# EAGLE board darwin-integrated-panel (EAGLE 9.4.2)
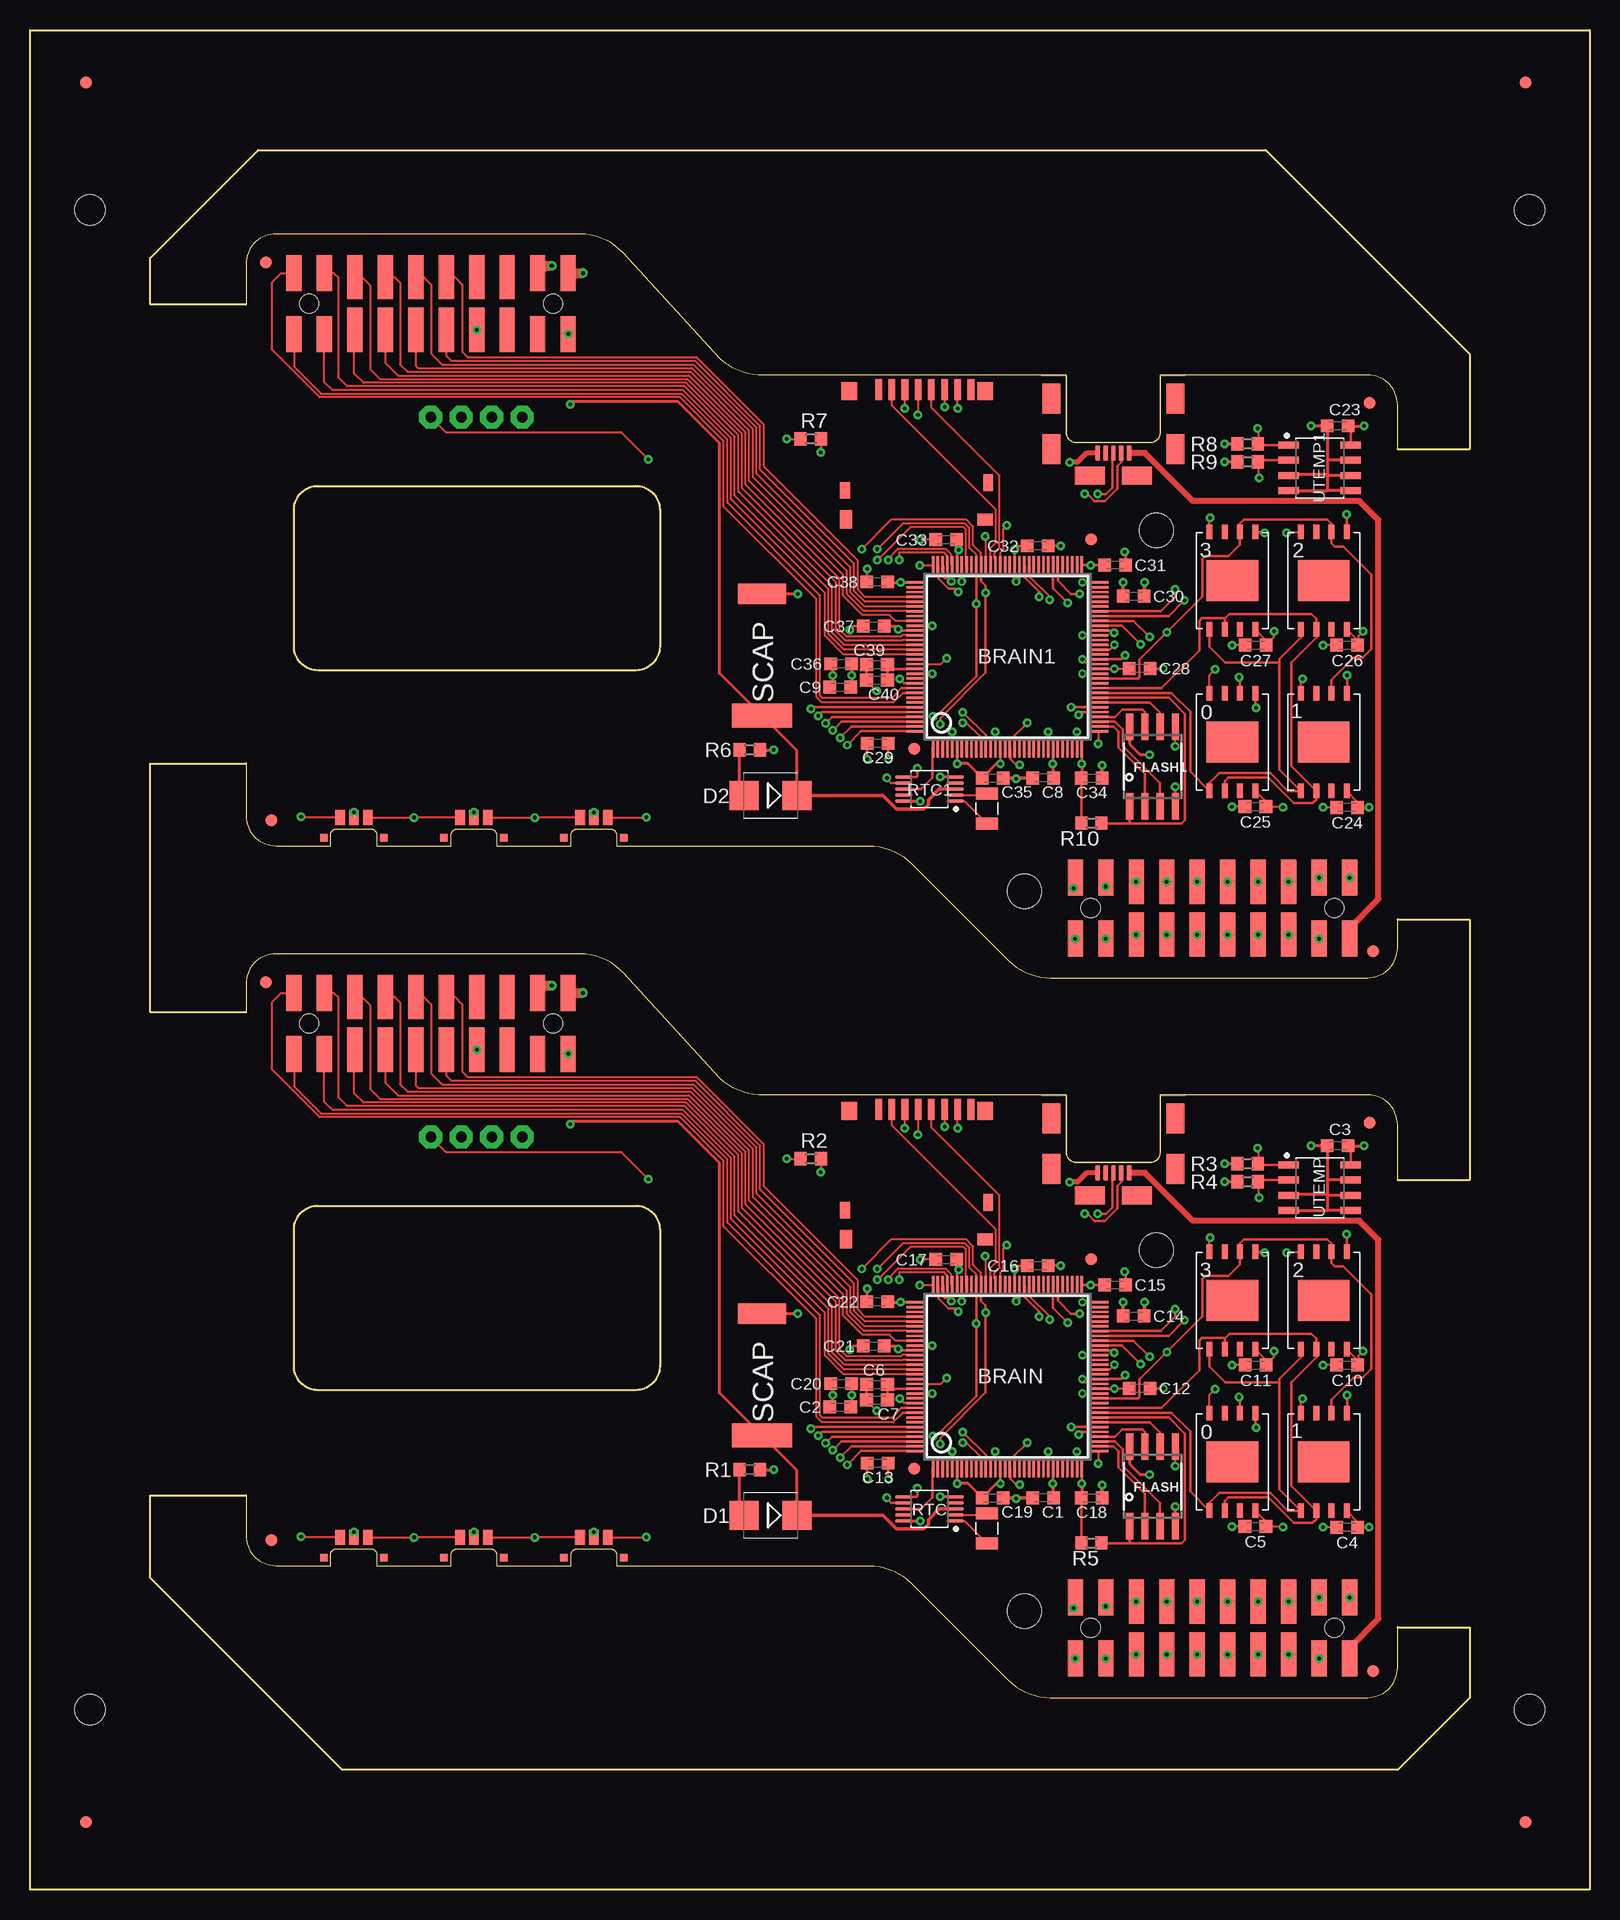
[diagram p0: board, top side]
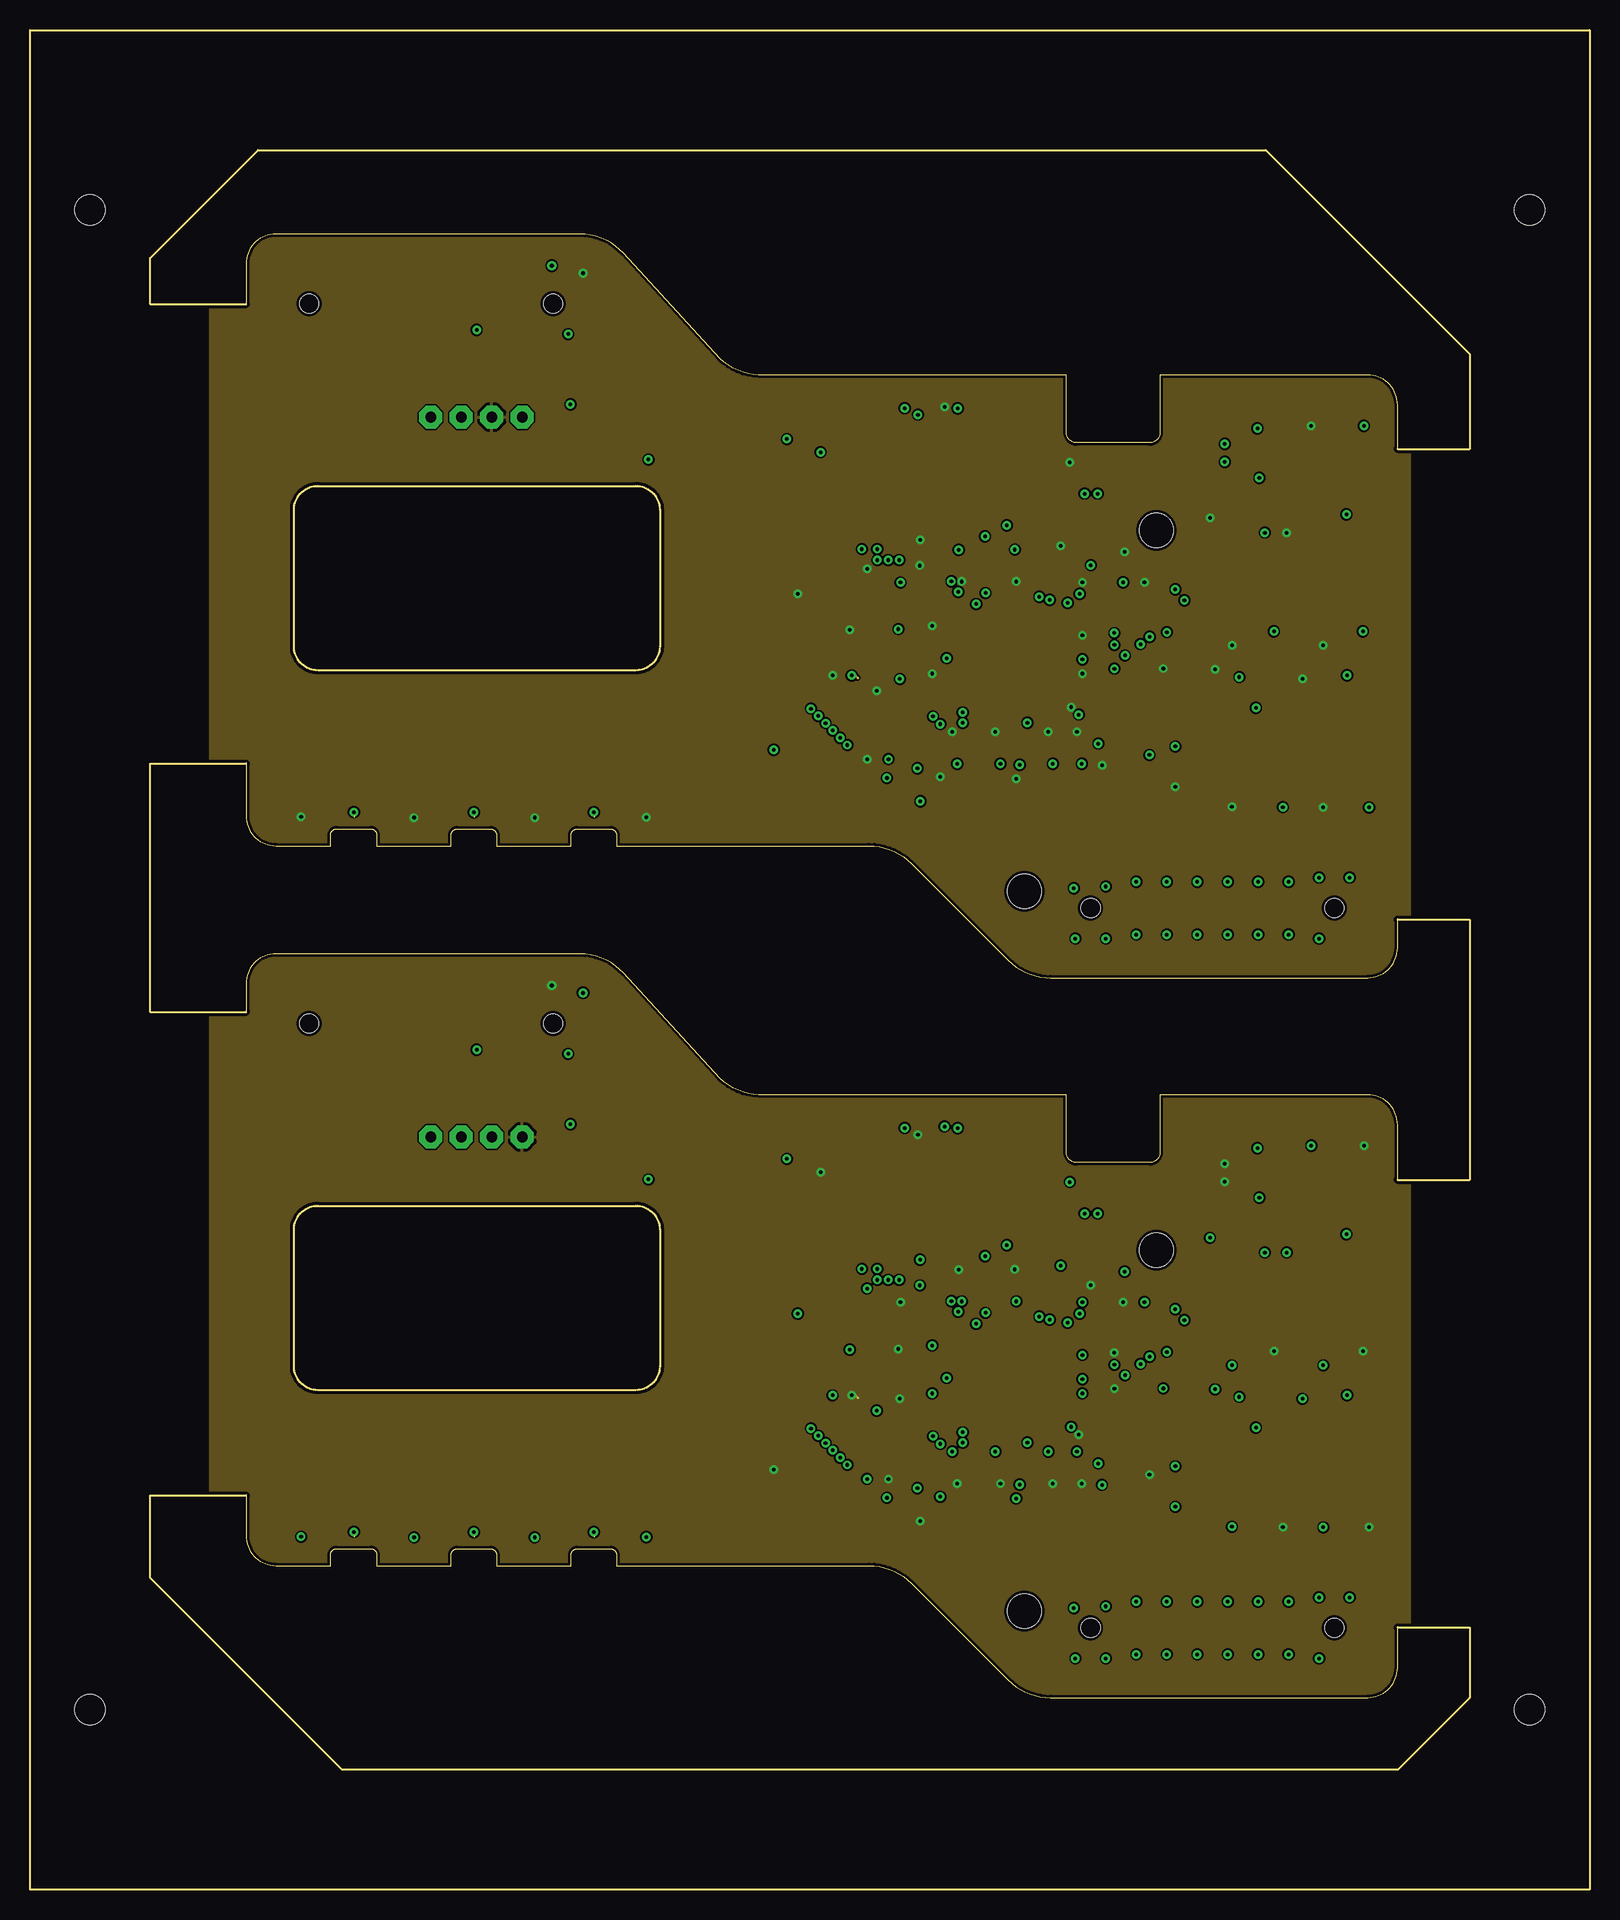
[diagram p1: board, inner layer PWR]
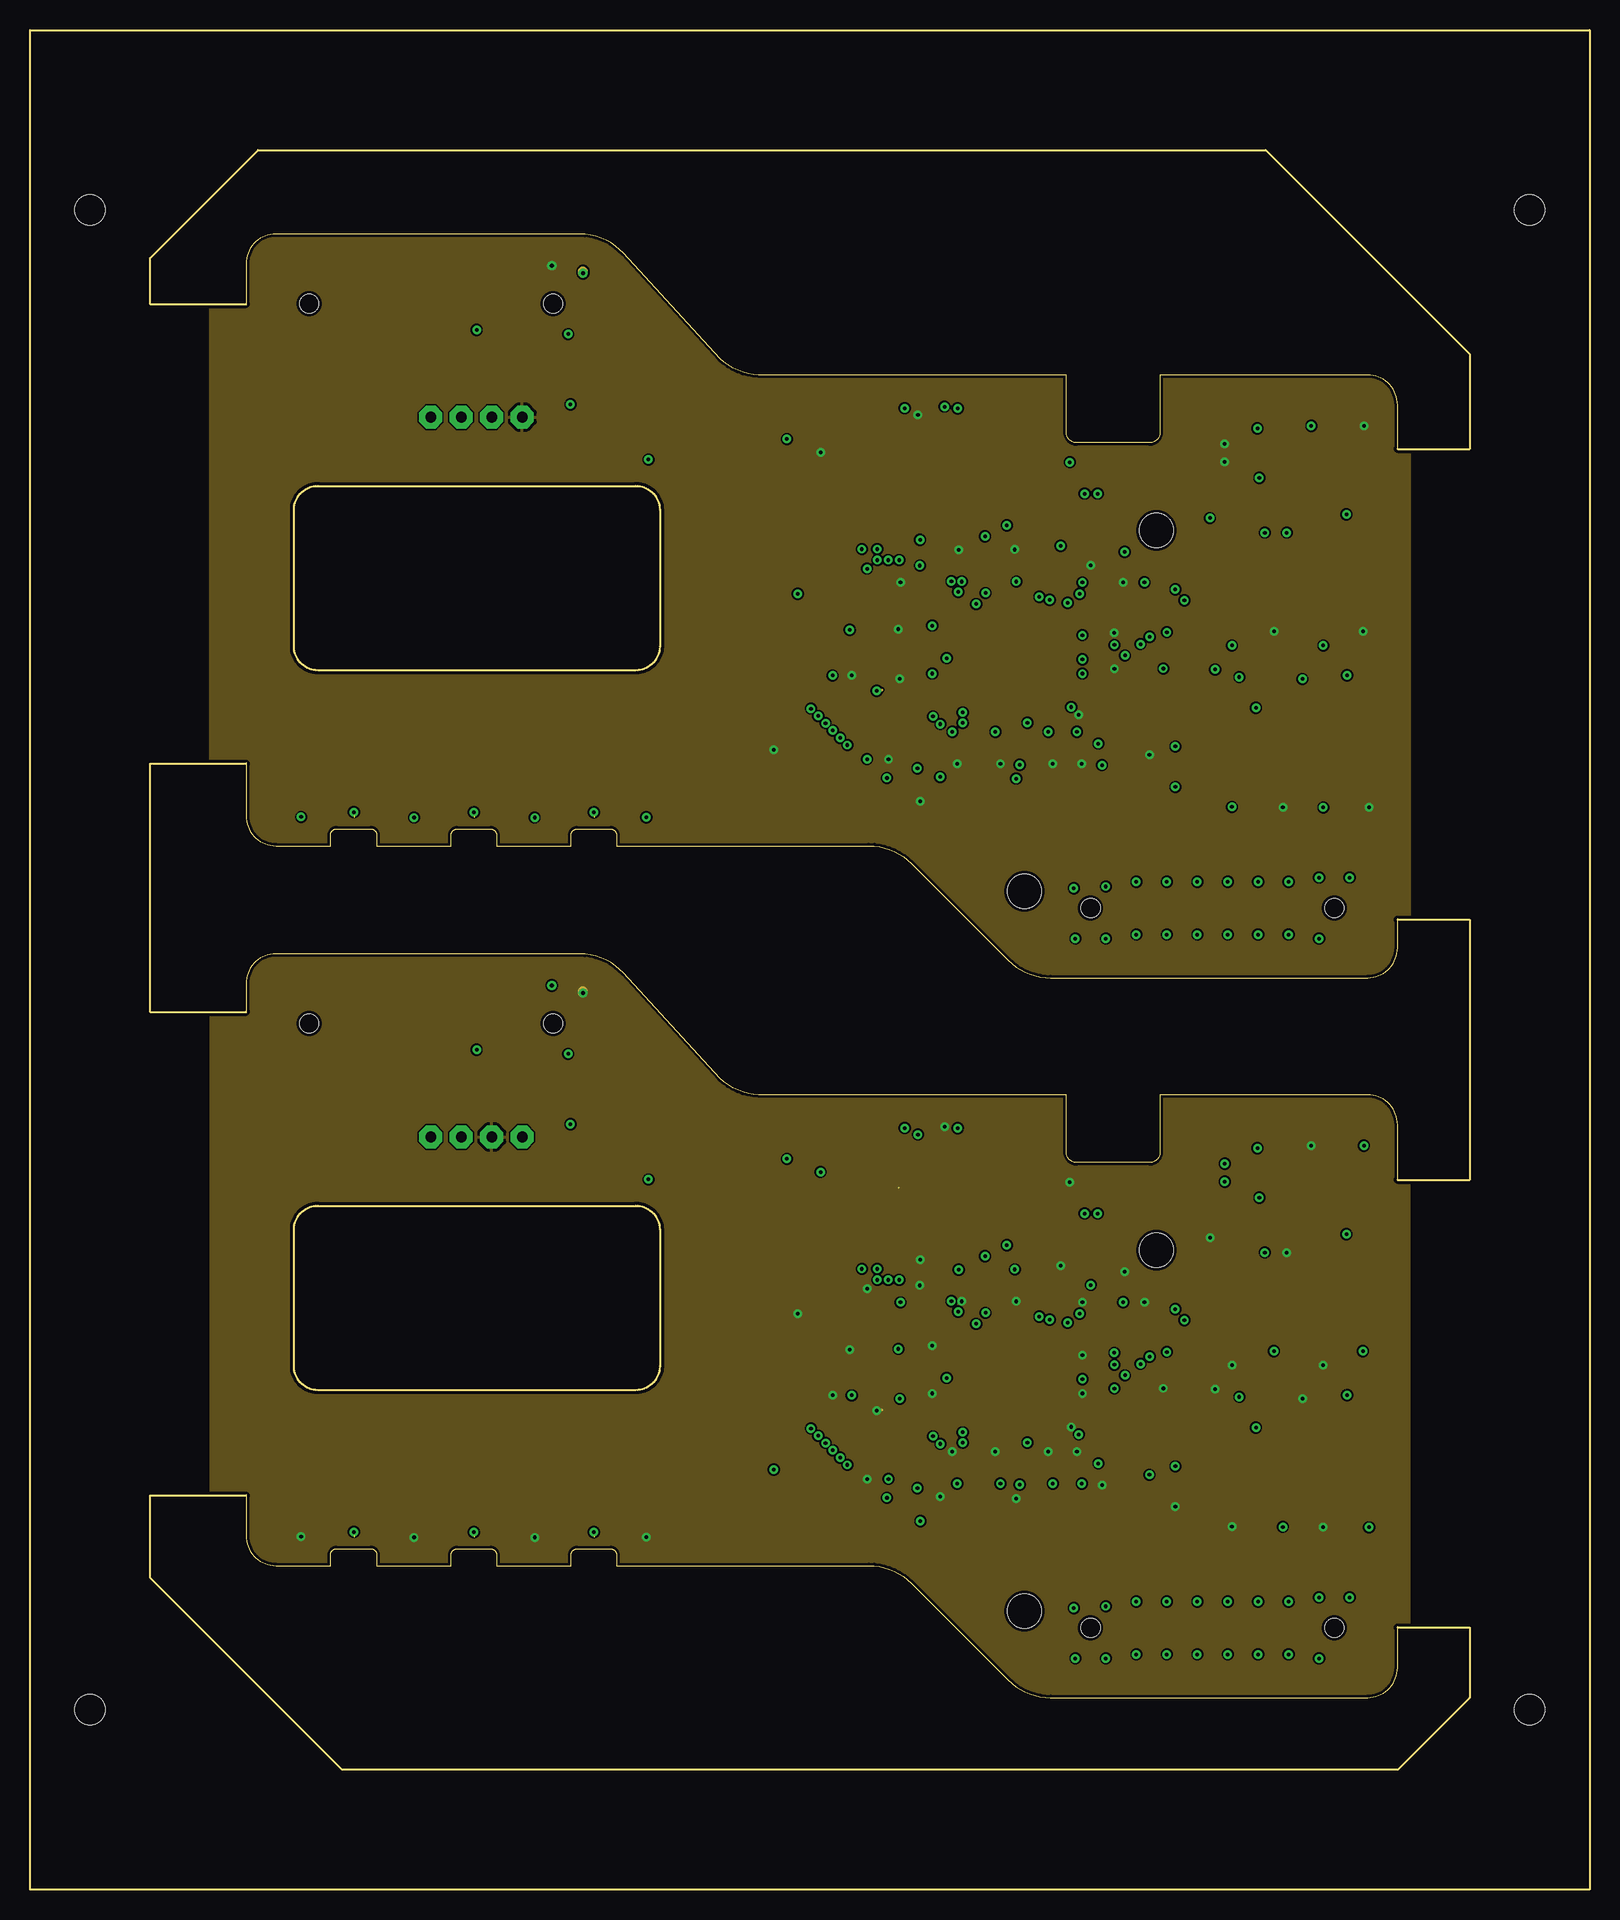
[diagram p2: board, inner layer GND]
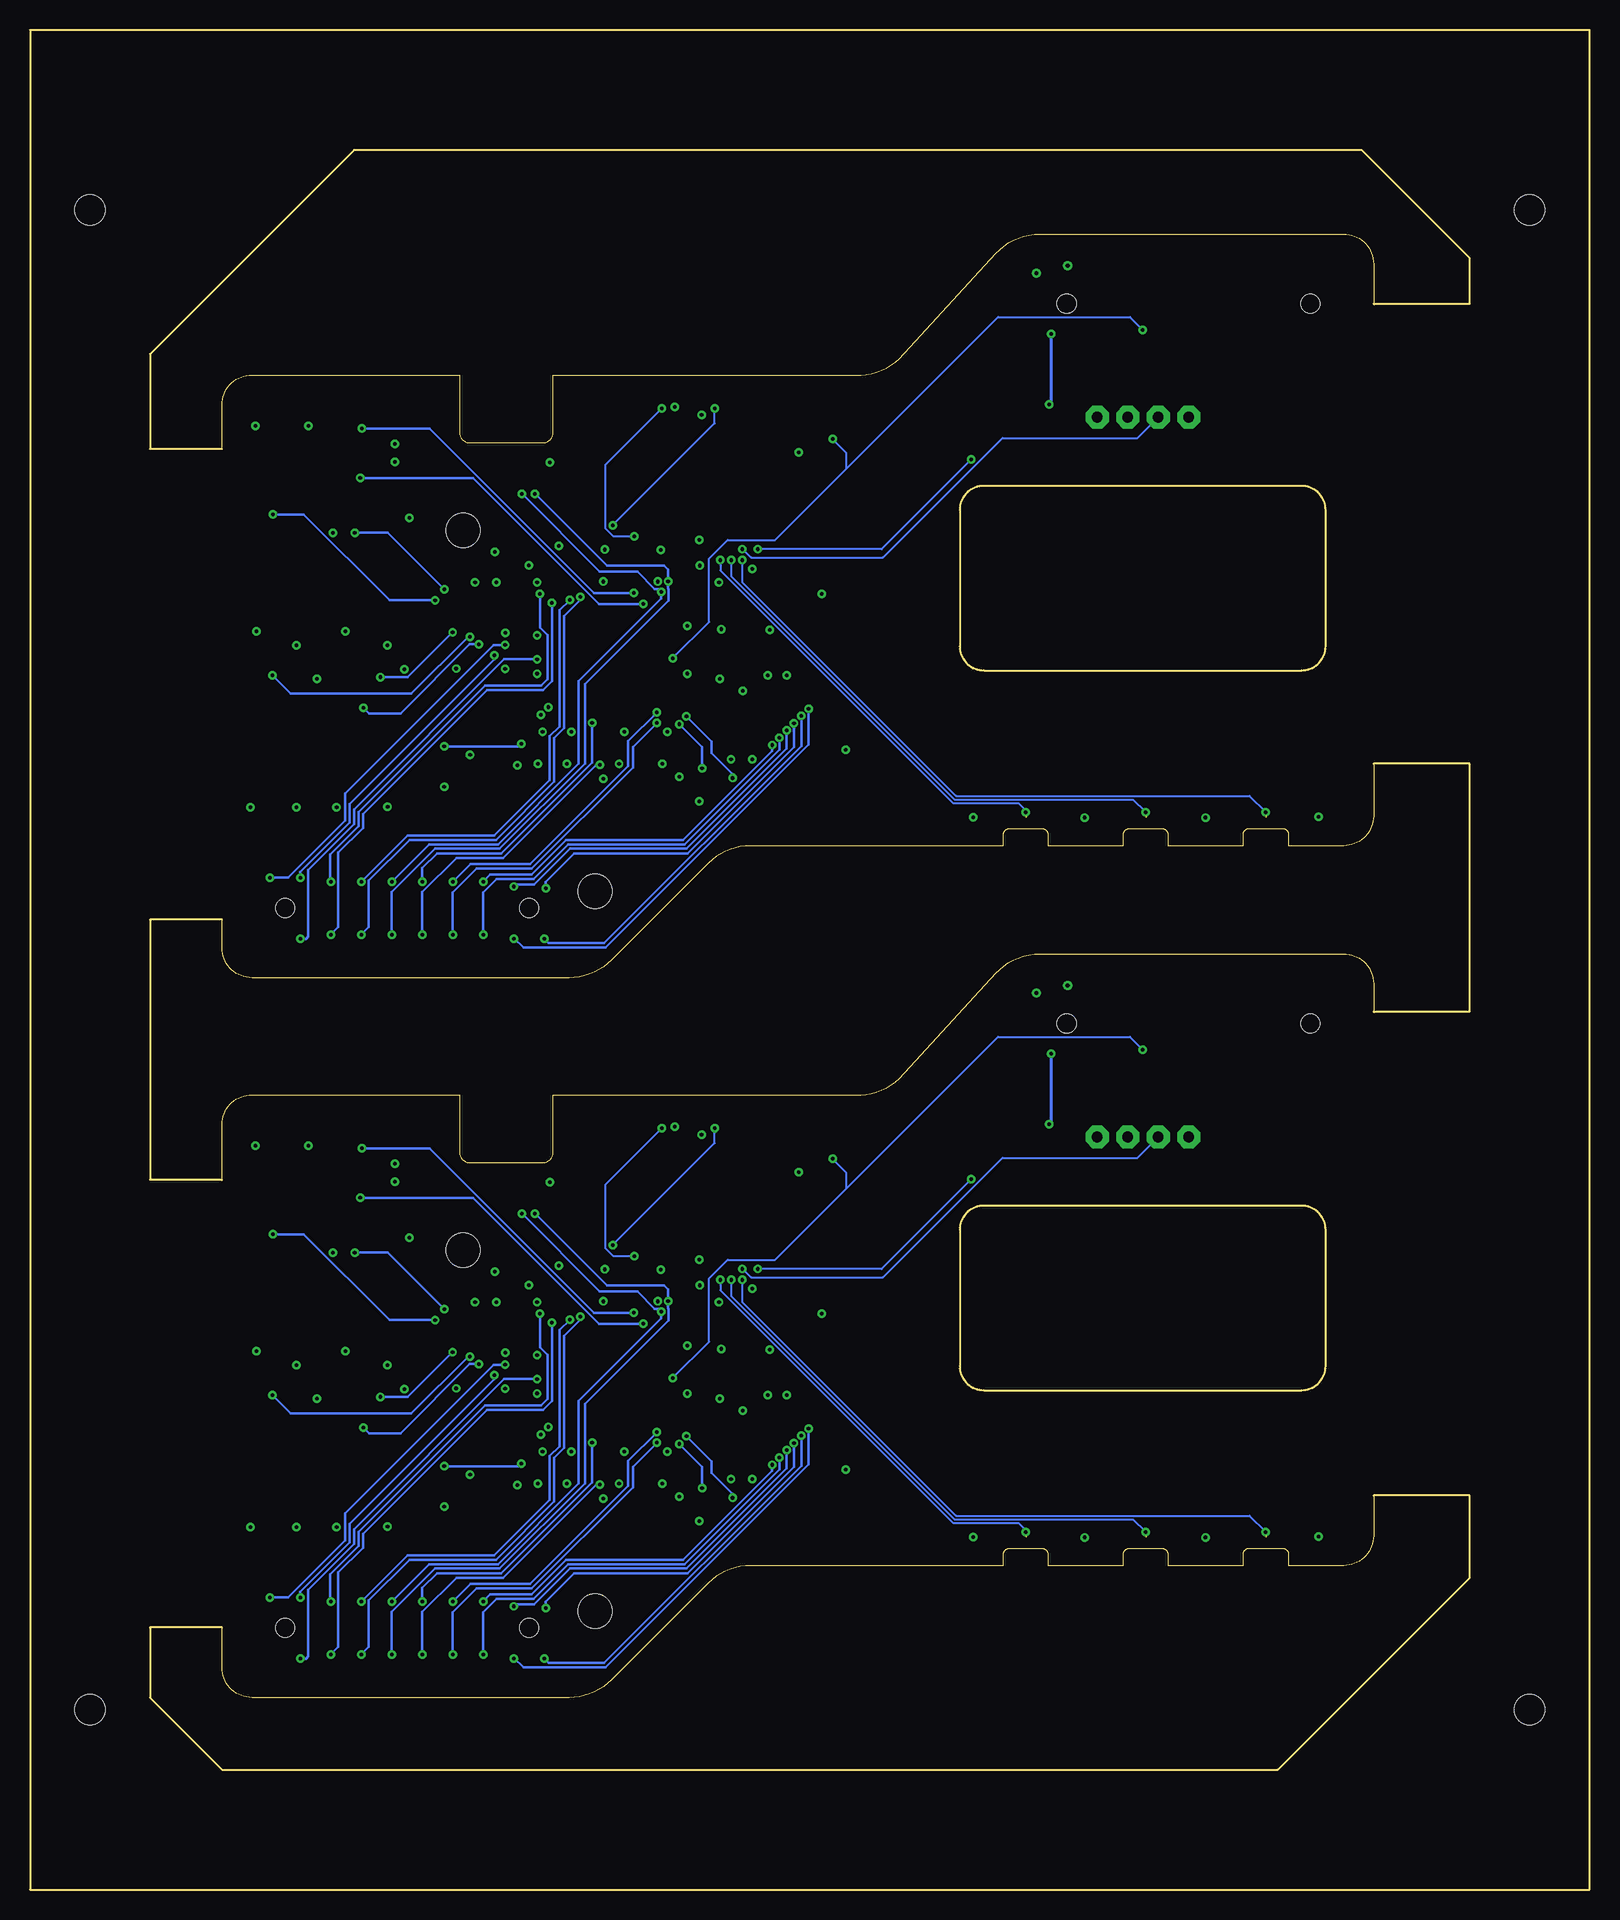
[diagram p3: board, bottom side, seen from below]

Size 130 x 155 mm. Coordinates in mm from the lower left corner, seen from the top.
Outline: 18,93.92 18,93.85
Outline: 18,93.85 18,89.5 arc90 20.5,87 25.06,87 25.06,87.91 arc-90 25.56,88.41 28.4,88.41 arc-90 28.9,87.91 28.9,87 35.1,87 35.1,87.9 arc-90 35.6,88.4 38.4,88.4 arc-90 38.9,87.9 38.9,87 45.1,87 45.1,87.9 arc-90 45.6,88.4 48.4,88.4 arc-90 48.9,87.9 48.9,87 69.93,87 arc-45 73.46,85.54 81.54,77.46 arc45 85.07,76 111.5,76 arc90 114,78.5 114,80.85
Outline: 18,132.15 18,135.5 arc-90 20.5,138 45.8,138 arc-47 49.49,136.38 57.51,127.62 arc47 61.2,126.25 86.4,126.25 86.4,121.44 arc90 87.25,120.59 93.34,120.59 arc90 94.19,121.44 94.19,126.23 94.22,126.23 111.5,126.25 arc-90 114,123.75 114,120.08 120,120.08 120,128 103,145 19,145 10,136 10,132.15 18,132.15
Outline: 18,132.15 18,132.08
Outline: 18,93.85 10,93.85 10,73.15 18,73.15
Outline: 18,73.15 18,75.5 arc-90 20.5,78 45.8,78 arc-47 49.49,76.38 57.51,67.62 arc47 61.2,66.25 86.4,66.25 86.4,61.44 arc90 87.25,60.59 93.34,60.59 arc90 94.19,61.44 94.19,66.23 94.22,66.23 111.5,66.25 arc-90 114,63.75 114,59.15
Outline: 18,73.15 18,73.08
Outline: 18,32.92 18,32.85
Outline: 18,32.85 18,29.5 arc90 20.5,27 25.06,27 25.06,27.91 arc-90 25.56,28.41 28.4,28.41 arc-90 28.9,27.91 28.9,27 35.1,27 35.1,27.9 arc-90 35.6,28.4 38.4,28.4 arc-90 38.9,27.9 38.9,27 45.1,27 45.1,27.9 arc-90 45.6,28.4 48.4,28.4 arc-90 48.9,27.9 48.9,27 69.93,27 arc-45 73.46,25.54 81.54,17.46 arc45 85.07,16 111.5,16 arc90 114,18.5 114,21.85
Outline: 18,32.85 10,32.85 10,26 26,10 114,10 120,16 120,21.85 114,21.85
Outline: 114,80.85 114,80.92
Outline: 114,80.85 120,80.85 120,59.15 114,59.15
Outline: 114,59.08 114,59.15
Outline: 114,21.85 114,21.92
Outline: 50.5,57 arc-90 52.5,55 52.5,43.62 arc-90 50.5,41.62 24,41.62 arc-90 22,43.62 22,55 arc-90 24,57 50.5,57
Outline: 50.5,117 arc-90 52.5,115 52.5,103.62 arc-90 50.5,101.62 24,101.62 arc-90 22,103.62 22,115 arc-90 24,117 50.5,117
Outline: 0,0 0,155 130,155 130,0 0,0
Copper layers (1+2*15+16): Top 0.035mm / dielectric 1.5mm / PWR 0.035mm / dielectric 0.15mm / GND 0.035mm / dielectric 0.2mm / Bottom 0.035mm
Design rules "default *": minimum track width 6mil, minimum drill 0.3mm, track to track 6mil, track to pad 6mil, pad to pad 6mil, via to via 6mil, smd to smd 6mil, copper to edge 10mil, drill to drill 6mil, minimum pad ring 10mil, minimum via ring 8mil, stop-mask expansion 4mil, vias tented up to drill 0.31mm, thermal gap 10mil
Holes 2.84 mm at 93.9,53.3 82.9,23.2 93.9,113.3 82.9,83.2
Holes 2.54 mm at 5,140 125,140 5,15 125,15

## Footprints (pad centres in the part's own frame; a part is rotated, then mirrored left to right if it is on the bottom)
SQFP-S-14X14-128 = smd 0.2 x 1.6: 1 -6.2,-7.6; 2 -5.8,-7.6; 3 -5.4,-7.6; 4 -5,-7.6; 5 -4.6,-7.6; 6 -4.2,-7.6; 7 -3.8,-7.6; 8 -3.4,-7.6; 9 -3,-7.6; 10 -2.6,-7.6; 11 -2.2,-7.6; 12 -1.8,-7.6; 13 -1.4,-7.6; 14 -1,-7.6; 15 -0.6,-7.6; 16 -0.2,-7.6; 17 0.2,-7.6; 18 0.6,-7.6; 19 1,-7.6; 20 1.4,-7.6; 21 1.8,-7.6; 22 2.2,-7.6; 23 2.6,-7.6; 24 3,-7.6; 25 3.4,-7.6; 26 3.8,-7.6; 27 4.2,-7.6; 28 4.6,-7.6; 29 5,-7.6; 30 5.4,-7.6; 31 5.8,-7.6; 32 6.2,-7.6; 65 6.2,7.6; 66 5.8,7.6; 67 5.4,7.6; 68 5,7.6; 69 4.6,7.6; 70 4.2,7.6; 71 3.8,7.6; 72 3.4,7.6; 73 3,7.6; 74 2.6,7.6; 75 2.2,7.6; 76 1.8,7.6; 77 1.4,7.6; 78 1,7.6; 79 0.6,7.6; 80 0.2,7.6; 81 -0.2,7.6; 82 -0.6,7.6; 83 -1,7.6; 84 -1.4,7.6; 85 -1.8,7.6; 86 -2.2,7.6; 87 -2.6,7.6; 88 -3,7.6; 89 -3.4,7.6; 90 -3.8,7.6; 91 -4.2,7.6; 92 -4.6,7.6; 93 -5,7.6; 94 -5.4,7.6; 95 -5.8,7.6; 96 -6.2,7.6 | smd 1.6 x 0.2: 33 7.6,-6.2; 34 7.6,-5.8; 35 7.6,-5.4; 36 7.6,-5; 37 7.6,-4.6; 38 7.6,-4.2; 39 7.6,-3.8; 40 7.6,-3.4; 41 7.6,-3; 42 7.6,-2.6; 43 7.6,-2.2; 44 7.6,-1.8; 45 7.6,-1.4; 46 7.6,-1; 47 7.6,-0.6; 48 7.6,-0.2; 49 7.6,0.2; 50 7.6,0.6; 51 7.6,1; 52 7.6,1.4; 53 7.6,1.8; 54 7.6,2.2; 55 7.6,2.6; 56 7.6,3; 57 7.6,3.4; 58 7.6,3.8; 59 7.6,4.2; 60 7.6,4.6; 61 7.6,5; 62 7.6,5.4; 63 7.6,5.8; 64 7.6,6.2; 97 -7.6,6.2; 98 -7.6,5.8; 99 -7.6,5.4; 100 -7.6,5; 101 -7.6,4.6; 102 -7.6,4.2; 103 -7.6,3.8; 104 -7.6,3.4; 105 -7.6,3; 106 -7.6,2.6; 107 -7.6,2.2; 108 -7.6,1.8; 109 -7.6,1.4; 110 -7.6,1; 111 -7.6,0.6; 112 -7.6,0.2; 113 -7.6,-0.2; 114 -7.6,-0.6; 115 -7.6,-1; 116 -7.6,-1.4; 117 -7.6,-1.8; 118 -7.6,-2.2; 119 -7.6,-2.6; 120 -7.6,-3; 121 -7.6,-3.4; 122 -7.6,-3.8; 123 -7.6,-4.2; 124 -7.6,-4.6; 125 -7.6,-5; 126 -7.6,-5.4; 127 -7.6,-5.8; 128 -7.6,-6.2
EVP-AEJB2A = smd 0.8 x 1.25: A0 -1.15,2.375; A1 1.15,2.375; B 0,2.375 | smd 0.65 x 0.65: PAD -2.5,0.675; PAD1 2.5,0.675
C0603K = smd 1.05 x 1.08: 1 -0.875,0; 2 0.875,0
SMB = smd 2.4 x 2.4: A 2.2,0; C -2.2,0
FIDUCIAL_1MM = smd 1 x 1: 1 0,0
SOIC8_208MIL = smd 0.6 x 2.2: 1 -1.905,-3.315; 2 -0.635,-3.315; 3 0.635,-3.315; 4 1.905,-3.315; 5 1.905,3.315; 6 0.635,3.315; 7 -0.635,3.315; 8 -1.905,3.315
20PH-F = smd 3 x 1.27: PIN1 -0.34,0; PIN2 -0.34,-2.54; PIN9 -0.34,-20.32; PIN10 -0.34,-22.86; PIN11 4.74,-22.86; PIN12 4.74,-20.32; PIN19 4.74,-2.54; PIN20 4.74,0 | smd 3.68 x 1.27: PIN3 0,-5.08; PIN4 0,-7.62; PIN5 0,-10.16; PIN6 0,-12.7; PIN7 0,-15.24; PIN8 0,-17.78; PIN13 4.4,-17.78; PIN14 4.4,-15.24; PIN15 4.4,-12.7; PIN16 4.4,-10.16; PIN17 4.4,-7.62; PIN18 4.4,-5.08 | hole 1.58: 2.2,-1.27; 2.2,-21.59
R0603 = smd 1 x 1.1: 1 -0.85,0; 2 0.85,0
SOP50P490X110-10 = smd 1.438 x 0.297: 1 -2.145,1; 2 -2.145,0.5; 3 -2.145,0; 4 -2.145,-0.5; 5 -2.145,-1; 6 2.145,-1; 7 2.145,-0.5; 8 2.145,0; 9 2.145,0.5; 10 2.145,1
WSON8 = smd 0.5 x 1.2: P$1 -1.905,-4.06; P$2 -0.635,-4.06; P$3 0.635,-4.06; P$4 1.905,-4.06; P$5 1.905,4.06; P$6 0.635,4.06; P$7 -0.635,4.06; P$8 -1.905,4.06 | smd 4.3 x 3.4: PAD 0,0
SUPERCAP = smd 5 x 2: + 0,5.15 | smd 4 x 1.7: - 0,-5
MOELX-47491-0001 = smd 1.25 x 0.4: D+ 0.875,0; D- 0.875,0.65; GND 0.875,-1.3; ID 0.875,-0.65; VCC 0.875,1.3 | smd 2.5 x 1.5: PAD1 -3.65,5.15; PAD2 0.55,5.15; PAD5 0.55,-5.15; PAD6 -3.65,-5.15 | smd 1.5 x 2.5: PAD3 2.75,1.95; PAD4 2.75,-1.95
DM3D-SF = smd 0.55 x 1.75: CD/DAT3 6.6,-0.875; CLK 3.3,-0.875; CMD 5.5,-0.875; DAT0 1.1,-0.875; DAT1 0,-0.875; DAT2 7.7,-0.875; VDD 4.4,-0.875; VSS 2.2,-0.875 | smd 1.3 x 1.5: PAD1 -1.2,-0.75; PAD2 10.15,-0.75 | smd 0.8 x 1.4: PAD3 10.5,7.5; PAD6 -1.45,6.85 | smd 1 x 1.55: PAD4 10.4,9.925 | smd 1.3 x 1: PAD5 -1.2,9.925
SCREEN = drill 0.889 pad 1.905 octagon: P0 13.97,1.27; P1 16.51,1.27; P2 19.05,1.27; P3 21.59,1.27
ABS07W = smd 1 x 1.8: P$1 -1.25,0; P$2 1.25,0
SO8 = smd 1.746 x 0.592: 1 -2.585,1.905; 2 -2.585,0.635; 3 -2.585,-0.635; 4 -2.585,-1.905; 5 2.585,-1.905; 6 2.585,-0.635; 7 2.585,0.635; 8 2.585,1.905

## Placement (x,y rotation side)
BRAIN  SAMD51PXXA  [SQFP-S-14X14-128]  81.48,42.75 0 top
BRAIN1  SAMD51PXXA  [SQFP-S-14X14-128]  81.48,102.75 0 top
BTN1  EVP-AEJB2A  [EVP-AEJB2A]  27,27 0 top
BTN2  EVP-AEJB2A  [EVP-AEJB2A]  37,27 0 top
BTN3  EVP-AEJB2A  [EVP-AEJB2A]  47,27 0 top
BTN4  EVP-AEJB2A  [EVP-AEJB2A]  27,87 0 top
BTN5  EVP-AEJB2A  [EVP-AEJB2A]  37,87 0 top
BTN6  EVP-AEJB2A  [EVP-AEJB2A]  47,87 0 top
C1  [C0603K]  84.46,32.66 180 top
C2  [C0603K]  67.53,40.22 180 top
C3  [C0603K]  109,62 180 top
C4  [C0603K]  109.79,30.2 180 top
C5  [C0603K]  102.15,30.26 180 top
C6  .1u  [C0603K]  70.6,42.1 180 top
C7  4.7u  [C0603K]  70.6,40.8 180 top
C8  [C0603K]  84.46,92.66 180 top
C9  [C0603K]  67.53,100.22 180 top
C10  [C0603K]  109.8,43.72 180 top
C11  [C0603K]  102.16,43.72 180 top
C12  [C0603K]  92.5,41.78 0 top
C13  [C0603K]  70.66,35.54 180 top
C14  [C0603K]  92,47.8 0 top
C15  [C0603K]  90.46,50.4 0 top
C16  [C0603K]  84,52 0 top
C17  [C0603K]  76.37,52.51 180 top
C18  [C0603K]  88.49,32.63 0 top
C19  [C0603K]  80.25,32.63 0 top
C20  [C0603K]  67.63,42.17 180 top
C21  [C0603K]  70.33,45.3 180 top
C22  [C0603K]  70.64,49 180 top
C23  [C0603K]  109,122 180 top
C24  [C0603K]  109.79,90.2 180 top
C25  [C0603K]  102.15,90.26 180 top
C26  [C0603K]  109.8,103.72 180 top
C27  [C0603K]  102.16,103.72 180 top
C28  [C0603K]  92.5,101.78 0 top
C29  [C0603K]  70.66,95.54 180 top
C30  [C0603K]  92,107.8 0 top
C31  [C0603K]  90.46,110.4 0 top
C32  [C0603K]  84,112 0 top
C33  [C0603K]  76.37,112.51 180 top
C34  [C0603K]  88.49,92.64 0 top
C35  [C0603K]  80.25,92.64 0 top
C36  [C0603K]  67.63,102.17 180 top
C37  [C0603K]  70.33,105.3 180 top
C38  [C0603K]  70.64,109 180 top
C39  .1u  [C0603K]  70.6,102.1 180 top
C40  4.7u  [C0603K]  70.6,100.8 180 top
D1  [SMB]  61.73,31.18 180 top
D2  [SMB]  61.73,91.18 180 top
FID1  FIDUCIAL_1MM  [FIDUCIAL_1MM]  20.13,29.11 0 top
FID2  FIDUCIAL_1MM  [FIDUCIAL_1MM]  19.69,75.64 0 top
FID3  FIDUCIAL_1MM  [FIDUCIAL_1MM]  111.66,63.93 0 top
FID4  FIDUCIAL_1MM  [FIDUCIAL_1MM]  111.94,18.2 0 top
FID5  FIDUCIAL_1MM  [FIDUCIAL_1MM]  88.47,52.53 0 top
FID6  FIDUCIAL_1MM  [FIDUCIAL_1MM]  73.71,35.08 0 top
FID7  FIDUCIAL_1MM  [FIDUCIAL_1MM]  20.13,89.11 0 top
FID8  FIDUCIAL_1MM  [FIDUCIAL_1MM]  19.69,135.64 0 top
FID9  FIDUCIAL_1MM  [FIDUCIAL_1MM]  111.66,123.93 0 top
FID10  FIDUCIAL_1MM  [FIDUCIAL_1MM]  111.94,78.2 0 top
FID11  FIDUCIAL_1MM  [FIDUCIAL_1MM]  88.47,112.53 0 top
FID12  FIDUCIAL_1MM  [FIDUCIAL_1MM]  73.71,95.08 0 top
FID13  FIDUCIAL_1MM  [FIDUCIAL_1MM]  4.69,5.64 0 top
FID14  FIDUCIAL_1MM  [FIDUCIAL_1MM]  124.69,5.64 0 top
FID15  FIDUCIAL_1MM  [FIDUCIAL_1MM]  4.69,150.64 0 top
FID16  FIDUCIAL_1MM  [FIDUCIAL_1MM]  124.69,150.64 0 top
FLASH  [SOIC8_208MIL]  93.57,33.61 0 top
FLASH1  [SOIC8_208MIL]  93.57,93.61 0 top
LOWER  MOLEX-15-91-2200F  [20PH-F]  110,24 270 top
LOWER1  MOLEX-15-91-2200F  [20PH-F]  110,84 270 top
R1  [R0603]  60,35 180 top
R2  [R0603]  65.1,60.92 0 top
R3  [R0603]  101.5,60.5 180 top
R4  [R0603]  101.5,59 180 top
R5  [R0603]  88.48,28.89 180 top
R6  [R0603]  60,95 180 top
R7  [R0603]  65.1,120.92 0 top
R8  [R0603]  101.5,120.5 180 top
R9  [R0603]  101.5,119 180 top
R10  [R0603]  88.48,88.89 180 top
RTC  PCF85363ATT  [SOP50P490X110-10]  74.98,31.73 180 top
RTC1  PCF85363ATT  [SOP50P490X110-10]  74.98,91.73 180 top
U$1  TC58CVG1S3HRAIG  [WSON8]  100.23,95.64 180 top
U$2  TC58CVG1S3HRAIG  [WSON8]  107.85,95.64 180 top
U$3  TC58CVG1S3HRAIG  [WSON8]  100.23,35.64 180 top
U$4  TC58CVG1S3HRAIG  [WSON8]  107.85,35.64 180 top
U$5  TC58CVG1S3HRAIG  [WSON8]  107.85,49.1 180 top
U$6  TC58CVG1S3HRAIG  [WSON8]  100.23,49.1 180 top
U$7  DSK-3R3H204T614-H2L  [SUPERCAP]  61,43 180 top
U$8  MOLEX-47491-0001  [MOELX-47491-0001]  90.31,60.6 270 top
U$9  DM3D-SF  [DM3D-SF]  78.44,64.13 180 top
U$10  SCREEN  [SCREEN]  55,64 180 top
U$11  TC58CVG1S3HRAIG  [WSON8]  107.85,109.1 180 top
U$12  TC58CVG1S3HRAIG  [WSON8]  100.23,109.1 180 top
U$13  DSK-3R3H204T614-H2L  [SUPERCAP]  61,103 180 top
U$14  ABS07W  [ABS07W]  79.77,30.09 270 top
U$15  MOLEX-47491-0001  [MOELX-47491-0001]  90.31,120.6 270 top
U$16  DM3D-SF  [DM3D-SF]  78.44,124.13 180 top
U$17  SCREEN  [SCREEN]  55,124 180 top
U$18  ABS07W  [ABS07W]  79.77,90.09 270 top
UPPER  MOLEX-15-91-2200F  [20PH-F]  22,70 90 top
UPPER1  MOLEX-15-91-2200F  [20PH-F]  22,130 90 top
UTEMP  PCT2075  [SO8]  107.5,58.5 0 top
UTEMP1  PCT2075  [SO8]  107.5,118.5 0 top

## Library data of the parts
BRAIN BRAIN1 FLASH FLASH1 = microbuilder
BTN1-BTN6 LOWER LOWER1 RTC RTC1 U$1-U$18 UPPER UPPER1 UTEMP UTEMP1 = Conservify
C1-C40 = rcl; SPICEPREFIX: C
D1 D2 = diode
FID1-FID16 = microbuilder; BOM: EXCLUDE
R1-R10 = rcl; SPICEPREFIX: R

## Nets
3V1: BRAIN1.6 BRAIN1.15 BRAIN1.26 BRAIN1.32 BRAIN1.37 BRAIN1.46 BRAIN1.54 BRAIN1.65 BRAIN1.79 BRAIN1.91 BRAIN1.97 BRAIN1.107 BRAIN1.118 C8.1 C9.1 C23.1 C24.1 C25.1 C26.1 C27.1 C28.1 C29.1 C30.1 C31.1 C32.1 C33.1 C34.1 C35.1 C36.1 C37.1 C38.1 FLASH1.8 R6.1 R7.2 R8.2 R9.2 R10.2 RTC1.10 U$1.P$8 U$2.P$8 U$11.P$8 U$12.P$8 U$16.VDD U$17.P0 UPPER1.PIN12 UTEMP1.8
3V3: BRAIN.6 BRAIN.15 BRAIN.26 BRAIN.32 BRAIN.37 BRAIN.46 BRAIN.54 BRAIN.65 BRAIN.79 BRAIN.91 BRAIN.97 BRAIN.107 BRAIN.118 C1.1 C2.1 C3.1 C4.1 C5.1 C10.1 C11.1 C12.1 C13.1 C14.1 C15.1 C16.1 C17.1 C18.1 C19.1 C20.1 C21.1 C22.1 FLASH.8 R1.1 R2.2 R3.2 R4.2 R5.2 RTC.10 U$3.P$8 U$4.P$8 U$5.P$8 U$6.P$8 U$9.VDD U$10.P0 UPPER.PIN12 UTEMP.8
BUT1: BRAIN.89 BTN1.B
BUT2: BRAIN.92 BTN2.B
BUT3: BRAIN.93 BTN3.B
BUT4: BRAIN1.89 BTN4.B
BUT5: BRAIN1.92 BTN5.B
BUT6: BRAIN1.93 BTN6.B
CLOCK: BRAIN.1 RTC.8
CLOCK1: BRAIN1.1 RTC1.8
CORE_SCL: BRAIN.87 R4.1 RTC.7 U$10.P2 UTEMP.2
CORE_SCL1: BRAIN1.87 R9.1 RTC1.7 U$17.P2 UTEMP1.2
CORE_SDA: BRAIN.86 R3.1 RTC.6 U$10.P3 UTEMP.1
CORE_SDA1: BRAIN1.86 R8.1 RTC1.6 U$17.P3 UTEMP1.1
D+: BRAIN.95 LOWER.PIN5 U$8.D+
D+1: BRAIN1.95 LOWER1.PIN5 U$15.D+
D-: BRAIN.94 LOWER.PIN16 U$8.D-
D-1: BRAIN1.94 LOWER1.PIN16 U$15.D-
EEPROM_PROT: BRAIN.126 LOWER.PIN9
EEPROM_PROT1: BRAIN1.126 LOWER1.PIN9
FLASH_MISO: BRAIN.44 U$3.P$2 U$4.P$2 U$5.P$2 U$6.P$2
FLASH_MISO1: BRAIN1.44 U$1.P$2 U$2.P$2 U$11.P$2 U$12.P$2
FLASH_MOSI: BRAIN.41 U$3.P$5 U$4.P$5 U$5.P$5 U$6.P$5
FLASH_MOSI1: BRAIN1.41 U$1.P$5 U$2.P$5 U$11.P$5 U$12.P$5
FLASH_S0: BRAIN.55 U$3.P$1
FLASH_S1: BRAIN.56 U$4.P$1
FLASH_S2: BRAIN.57 U$5.P$1
FLASH_S3: BRAIN.58 U$6.P$1
FLASH_S4: BRAIN1.55 U$1.P$1
FLASH_S5: BRAIN1.56 U$2.P$1
FLASH_S6: BRAIN1.57 U$11.P$1
FLASH_S7: BRAIN1.58 U$12.P$1
FLASH_SCK: BRAIN.42 U$3.P$6 U$4.P$6 U$5.P$6 U$6.P$6
FLASH_SCK1: BRAIN1.42 U$1.P$6 U$2.P$6 U$11.P$6 U$12.P$6
GND: BRAIN.5 BRAIN.14 BRAIN.25 BRAIN.31 BRAIN.38 BRAIN.45 BRAIN.53 BRAIN.64 BRAIN.78 BRAIN.90 BRAIN.96 BRAIN.106 BRAIN.116 BTN1.A0 BTN1.A1 BTN2.A0 BTN2.A1 BTN3.A0 BTN3.A1 C1.2 C2.2 C3.2 C4.2 C5.2 C6.2 C7.2 C10.2 C11.2 C12.2 C13.2 C14.2 C15.2 C16.2 C17.2 C18.2 C19.2 C20.2 C21.2 C22.2 FLASH.4 RTC.5 U$3.P$4 U$4.P$4 U$5.P$4 U$6.P$4 U$7.- U$8.GND U$9.VSS U$10.P1 UPPER.PIN11 UTEMP.3 UTEMP.4 UTEMP.5 UTEMP.6 UTEMP.7
GND1: BRAIN1.5 BRAIN1.14 BRAIN1.25 BRAIN1.31 BRAIN1.38 BRAIN1.45 BRAIN1.53 BRAIN1.64 BRAIN1.78 BRAIN1.90 BRAIN1.96 BRAIN1.106 BRAIN1.116 BTN4.A0 BTN4.A1 BTN5.A0 BTN5.A1 BTN6.A0 BTN6.A1 C8.2 C9.2 C23.2 C24.2 C25.2 C26.2 C27.2 C28.2 C29.2 C30.2 C31.2 C32.2 C33.2 C34.2 C35.2 C36.2 C37.2 C38.2 C39.2 C40.2 FLASH1.4 RTC1.5 U$1.P$4 U$2.P$4 U$11.P$4 U$12.P$4 U$13.- U$15.GND U$16.VSS U$17.P1 UPPER1.PIN11 UTEMP1.3 UTEMP1.4 UTEMP1.5 UTEMP1.6 UTEMP1.7
GPS_RX: BRAIN.101 UPPER.PIN6
GPS_RX1: BRAIN1.101 UPPER1.PIN6
GPS_TX: BRAIN.100 UPPER.PIN15
GPS_TX1: BRAIN1.100 UPPER1.PIN15
HOTSWAP_INT: BRAIN.128 LOWER.PIN8
HOTSWAP_INT1: BRAIN1.128 LOWER1.PIN8
MOD_G0: BRAIN.125 LOWER.PIN10
MOD_G1: BRAIN1.125 LOWER1.PIN10
MOD_G2: BRAIN.127 LOWER.PIN13
MOD_G3: BRAIN1.127 LOWER1.PIN13
MOD_G4: BRAIN.11 LOWER.PIN14
MOD_G5: BRAIN.12 LOWER.PIN7
MOD_G6: BRAIN.17 LOWER.PIN15
MOD_G7: BRAIN.18 LOWER.PIN6
MOD_G8: BRAIN.108 UPPER.PIN4
MOD_G9: BRAIN.109 UPPER.PIN18
MOD_G10: BRAIN.110 UPPER.PIN3
MOD_G11: BRAIN.111 UPPER.PIN19
MOD_G12: BRAIN.112 UPPER.PIN2
MOD_G13: BRAIN.123 LOWER.PIN12
MOD_G14: BRAIN.124 LOWER.PIN11
MOD_G15: BRAIN1.11 LOWER1.PIN14
MOD_G16: BRAIN1.12 LOWER1.PIN7
MOD_G17: BRAIN1.17 LOWER1.PIN15
MOD_G18: BRAIN1.18 LOWER1.PIN6
MOD_G19: BRAIN1.108 UPPER1.PIN4
MOD_G20: BRAIN1.109 UPPER1.PIN18
MOD_G21: BRAIN1.110 UPPER1.PIN3
MOD_G22: BRAIN1.111 UPPER1.PIN19
MOD_G23: BRAIN1.112 UPPER1.PIN2
MOD_G24: BRAIN1.123 LOWER1.PIN12
MOD_G25: BRAIN1.124 LOWER1.PIN11
MOD_MISO: BRAIN.50 LOWER.PIN1
MOD_MISO1: BRAIN1.50 LOWER1.PIN1
MOD_MOSI: BRAIN.47 LOWER.PIN19
MOD_MOSI1: BRAIN1.47 LOWER1.PIN19
MOD_SCK: BRAIN.48 LOWER.PIN2
MOD_SCK1: BRAIN1.48 LOWER1.PIN2
MOD_SCL: BRAIN.71 LOWER.PIN18
MOD_SCL1: BRAIN1.71 LOWER1.PIN18
MOD_SDA: BRAIN.70 LOWER.PIN3
MOD_SDA1: BRAIN1.70 LOWER1.PIN3
N$1: D2.A R6.2
N$2: D1.A R1.2
N$3: RTC.1 U$14.P$2
N$4: RTC.2 U$14.P$1
N$5: RTC1.1 U$18.P$2
N$6: BRAIN.115 C6.1 C7.1
N$7: RTC1.2 U$18.P$1
N$8: BRAIN1.115 C39.1 C40.1
QSPI_CS: BRAIN.40 FLASH.1 R5.1
QSPI_CS1: BRAIN1.40 FLASH1.1 R10.1
QSPI_IO0: BRAIN.33 FLASH.5
QSPI_IO1: BRAIN.34 FLASH.2
QSPI_IO2: BRAIN.35 FLASH.3
QSPI_IO3: BRAIN.36 FLASH.7
QSPI_IO4: BRAIN1.33 FLASH1.5
QSPI_IO5: BRAIN1.34 FLASH1.2
QSPI_IO6: BRAIN1.35 FLASH1.3
QSPI_IO7: BRAIN1.36 FLASH1.7
QSPI_SCK: BRAIN.39 FLASH.6
QSPI_SCK1: BRAIN1.39 FLASH1.6
RAD_SCL: BRAIN.77 LOWER.PIN17
RAD_SCL1: BRAIN1.77 LOWER1.PIN17
RAD_SDA: BRAIN.76 LOWER.PIN4
RAD_SDA1: BRAIN1.76 LOWER1.PIN4
RADIO_MISO: BRAIN.105 UPPER.PIN17
RADIO_MISO1: BRAIN1.105 UPPER1.PIN17
RADIO_MOSI: BRAIN.102 UPPER.PIN16
RADIO_MOSI1: BRAIN1.102 UPPER1.PIN16
RADIO_SCK: BRAIN.103 UPPER.PIN5
RADIO_SCK1: BRAIN1.103 UPPER1.PIN5
RESET: BRAIN.114 R2.1 UPPER.PIN7
RESET1: BRAIN1.114 R7.1 UPPER1.PIN7
SD_MISO: BRAIN.85 U$9.DAT0
SD_MISO1: BRAIN1.85 U$16.DAT0
SD_MOSI: BRAIN.82 U$9.CMD
SD_MOSI1: BRAIN1.82 U$16.CMD
SD_SCK: BRAIN.83 U$9.CLK
SD_SCK1: BRAIN1.83 U$16.CLK
SD_SS: BRAIN.84 U$9.CD/DAT3
SD_SS1: BRAIN1.84 U$16.CD/DAT3
SWCLK: BRAIN.119 UPPER.PIN1
SWCLK1: BRAIN1.119 UPPER1.PIN1
SWDIO: BRAIN.120 UPPER.PIN20
SWDIO1: BRAIN1.120 UPPER1.PIN20
UPPER_PIN1: UPPER1.PIN8
UPPER_PIN2: UPPER1.PIN9
UPPER_PIN3: UPPER1.PIN13
UPPER_PIN4: UPPER1.PIN14
UPPER_PIN8: UPPER.PIN8
UPPER_PIN9: UPPER.PIN9
UPPER_PIN13: UPPER.PIN13
UPPER_PIN14: UPPER.PIN14
USB_HOSTEN: BRAIN.113
USB_HOSTEN1: BRAIN1.113
V1: LOWER1.PIN20 U$15.VCC
V5: LOWER.PIN20 U$8.VCC
VBACKUP: D1.C RTC.3 U$7.+ UPPER.PIN10
VBACKUP1: D2.C RTC1.3 U$13.+ UPPER1.PIN10

## Tracks (layer width: path | path; a pad name or v marks a point on that pad's centre or on a via)
3V1  (via drill 0.3, 0.35)
  Top 0.152: C28.1 91.6,101.75 90.39,101.75 | UTEMP1.8 110,120.32 | R7.2 65.95,119.85 v65.9,119.8 | v77.42,111.67 77.24,111.85 C33.1 | 103.12,103.8 C27.1 | 109.76,91.56 U$2.P$8 110.66,90.66 C24.1 v111.63,90.2 | 102.22,91.48 U$1.P$8 103.02,90.69 C25.1 104.4,90.26 v104.44,90.22 | U$12.P$8 103.03,104.14 C27.1 | U$11.P$8 110.67,104.12 110.67,103.65 C26.1 110.72,103.76 110.72,104.47 v111.11,104.87 | C27.1 103.7,104.38 v103.7,104.87 | U$16.VDD 74.04,122.95 v74.02,122.93
  Top 0.2: R10.2 87.63,92.62 C34.1 | C23.1 110.08,121.79 UTEMP1.8
  Top 0.203: BRAIN1.97 72.59,108.95 | v72.57,108.95 v72.56,108.95 | BRAIN1.107 72.5,104.95 v72.39,105.06 | BRAIN1.91 77.28,111.53 | 77.28,111.53 77.28,111.66 | 77.28,111.53 v77.42,111.67 | BRAIN1.79 v82.08,111.68 v82.09,111.69 82.4,112 C32.1 | BRAIN1.54 90.18,104.95 v90.39,104.74 | v90.39,101.76 90.39,101.75 BRAIN1.46 | BRAIN1.37 87.65,98.15 v87.42,97.92 | BRAIN1.32 v87.68,93.84 v87.68,93.83 | v85.27,93.83 85.28,93.85 BRAIN1.26 | 80.88,93.85 v80.9,93.83 80.9,95.13 BRAIN1.15 | v77.29,93.83 77.28,93.84 BRAIN1.6 | C31.1 88.44,110.4 v88.42,110.39 87.72,110.39 BRAIN1.65 | C29.1 71.53,94.25 v71.56,94.22 | 68.54,100.05 C9.1 68.5,100.32 v68.5,101.2 C36.1 | BRAIN1.118 72.86,100.55 v72.51,100.91
  Top 0.254: RTC1.10 74.2,90.73 v74.22,90.71 | R6.1 v62,95 | FLASH1.8 91.67,95.49 92.58,94.57 v93.32,94.57 | C38.1 71.56,108.95 v72.57,108.95 72.59,108.95 | C37.1 71.25,105.27 72.19,105.27 v72.39,105.06 | 77.28,93.84 78.17,93.84 C35.1 80.58,93.83 v80.9,93.83 | v85.27,93.83 85.27,92.72 C8.1 | v87.68,93.83 87.68,92.7 C34.1 | C31.1 89.32,110.13 | C23.1 v111.2,122 | R8.2 v99.6,120.5 | R9.2 v99.6,119
  Top 0.305: C30.1 v91.12,108.95
  Top 0.813: UPPER1.PIN12 42.93,135.35 v43.5,135.35
  PWR 0.152: v65.9,119.8 v65.9,119.81 | v104.44,90.22 104.46,90.24 | v111.63,90.2 111.89,90.2 111.93,90.24 | v111.11,104.87 v111.12,104.87
  PWR 0.203: v72.51,100.91 72.61,101.01 | v68.5,101.2 68.8,101.2 69,101
  PWR 0.254: 111.16,121.94 111.2,121.97 v111.2,122 | v99.6,120.5 99.58,120.48 99.58,120.42 | v99.6,119 99.58,119.02 99.58,119.04
  pour GND: 15,140 110,140 115,135 115,75 65,75 55,85 15,85
3V3  (via drill 0.3, 0.35)
  Top 0.152: C12.1 91.6,41.75 90.39,41.75 | UTEMP.8 110,60.32 | R2.2 65.95,59.85 v65.9,59.8 | v77.42,51.67 77.24,51.85 C17.1 | 103.12,43.8 C11.1 | 109.76,31.56 U$4.P$8 110.66,30.66 C4.1 v111.63,30.2 | 102.22,31.48 U$3.P$8 103.02,30.68 C5.1 104.4,30.26 v104.44,30.22 | U$6.P$8 103.03,44.14 C11.1 | U$5.P$8 110.67,44.12 110.67,43.65 C10.1 110.72,43.76 110.72,44.47 v111.11,44.87 | C11.1 103.7,44.38 v103.7,44.87 | U$9.VDD 74.04,62.95 v74.02,62.93
  Top 0.2: R5.2 87.63,32.62 C18.1 | C3.1 110.08,61.79 UTEMP.8
  Top 0.203: BRAIN.97 72.59,48.95 | v72.57,48.95 v72.56,48.95 | BRAIN.107 72.5,44.95 v72.39,45.06 | BRAIN.91 77.28,51.53 | 77.28,51.53 77.28,51.66 | 77.28,51.53 v77.42,51.67 | BRAIN.79 v82.08,51.68 v82.09,51.69 82.4,52 C16.1 | BRAIN.54 90.18,44.95 v90.39,44.74 | v90.39,41.76 90.39,41.75 BRAIN.46 | BRAIN.37 87.65,38.15 v87.42,37.92 | BRAIN.32 v87.68,33.84 | v85.27,33.84 85.28,33.85 BRAIN.26 | 80.88,33.85 v80.9,33.84 80.9,35.13 BRAIN.15 | v77.29,33.84 77.28,33.84 BRAIN.6 | C15.1 88.44,50.4 v88.42,50.39 87.72,50.39 BRAIN.65 | C13.1 71.53,34.25 v71.56,34.22 | 68.54,40.05 C2.1 68.5,40.32 v68.5,41.2 C20.1 | BRAIN.118 72.86,40.55 v72.51,40.91
  Top 0.254: RTC.10 74.2,30.73 v74.22,30.71 | R1.1 v62,35 | FLASH.8 91.67,35.49 92.58,34.57 v93.32,34.57 | C22.1 71.56,48.95 v72.57,48.95 72.59,48.95 | C21.1 71.25,45.27 72.19,45.27 v72.39,45.06 | 77.28,33.84 78.17,33.84 C19.1 80.58,33.84 v80.9,33.84 | v85.27,33.84 85.27,32.72 C1.1 | v87.68,33.84 87.68,32.7 C18.1 | C15.1 89.32,50.13 | C3.1 v111.2,62 | R3.2 v99.6,60.5 | R4.2 v99.6,59
  Top 0.305: C14.1 v91.12,48.95
  Top 0.813: UPPER.PIN12 42.93,75.35 v43.5,75.35
  PWR 0.152: v65.9,59.8 v65.9,59.81 | v104.44,30.22 104.46,30.24 | v111.63,30.2 111.89,30.2 111.93,30.24 | v111.11,44.87 v111.12,44.87
  PWR 0.203: v72.51,40.91 72.61,41.01 | v68.5,41.2 68.8,41.2 69,41
  PWR 0.254: 111.16,61.94 111.2,61.98 v111.2,62 | v99.6,60.5 99.58,60.48 99.58,60.41 | v99.6,59 99.58,59.02 99.58,59.04
  pour PWR: 15,80 50,80 60,70 115,70 115,15 25,15 15,25
BUT1  (via drill 0.3)  (1 unrouted)
  Top 0.152: BRAIN.89 78.01,50.42 78.01,53.35 77.81,53.55 73.38,53.55 v70.64,50.81 | v27,29.8 27,29.5
  Bottom 0.152: v70.64,50.81 70.64,49 52.8,31.15 28.35,31.15 v27,29.8
BUT2  (via drill 0.3)  (1 unrouted)
  Top 0.152: BRAIN.92 76.81,50.42 76.81,51.28 76.36,51.73 72.33,51.73 71.55,50.95 v71.55,50.81 | v37,29.79 37,29.49
  Bottom 0.152: v71.55,50.81 71.55,49.47 52.92,30.85 38.05,30.85 v37,29.79
BUT3  (via drill 0.3)  (1 unrouted)
  Top 0.152: BRAIN.93 76.46,50.37 76.46,51.2 76.23,51.42 72.45,51.42 v72.45,50.81 | v47,29.79 47,29.49
  Bottom 0.152: v72.45,50.81 72.45,49.95 53.05,30.55 48.83,30.55 48.68,30.55 47.61,30.55 | 47.61,30.55 | 47.61,30.55 47,29.93 v47,29.79
BUT4  (via drill 0.3)  (1 unrouted)
  Top 0.152: BRAIN1.89 78.01,110.42 78.01,113.36 77.81,113.55 73.38,113.55 v70.64,110.81 | v27,89.81 27,89.5
  Bottom 0.152: v70.64,110.81 70.64,109 52.8,91.15 28.35,91.15 v27,89.81
BUT5  (via drill 0.3)  (1 unrouted)
  Top 0.152: BRAIN1.92 76.81,110.42 76.81,111.28 76.36,111.73 72.33,111.73 71.55,110.95 v71.55,110.81 | v37,89.79 37,89.49
  Bottom 0.152: v71.55,110.81 71.55,109.47 52.92,90.85 38.05,90.85 v37,89.79
BUT6  (via drill 0.3)  (1 unrouted)
  Top 0.152: BRAIN1.93 76.46,110.37 76.46,111.2 76.23,111.42 72.45,111.42 v72.45,110.81 | v47,89.79 47,89.49
  Bottom 0.152: v72.45,110.81 72.45,109.95 53.05,90.55 48.83,90.55 48.68,90.55 47.61,90.55 | 47.61,90.55 | 47.61,90.55 47,89.93 v47,89.79
CLOCK
  Top 0.203: BRAIN.1 75.25,35.15 75.25,32.69 74.28,31.73 RTC.8
CLOCK1
  Top 0.203: BRAIN1.1 75.25,95.15 75.25,92.69 74.28,91.73 RTC1.8
CORE_SCL  (via drill 0.3)
  Top 0.152: BRAIN.87 78.88,51.26 78.31,51.83 78.31,53.48 77.93,53.86 72.76,53.86 v70.63,51.73 | v102.48,57.67 102.44,57.71 102.44,59.09
  Top 0.2: UTEMP.2 102.48,59.13 102.44,59.09 R4.1
  Top 0.203: RTC.7 71.77,32.23 71.35,32.65 v71.44,32.65 | BRAIN.87 v78.88,47.16 78.88,41.16 75.5,37.78 v75.27,37.78
  Bottom 0.152: v70.63,51.73 70.59,51.73 69.89,51.02 58.9,51.02 48.92,61 37.68,61 U$10.P2
  Bottom 0.203: v75.27,37.78 73.17,35.67 73.17,34.72 71.44,32.98 v71.44,32.65 | v78.88,47.16 82.58,47.16 93.08,57.66 102.47,57.66 v102.48,57.67
CORE_SCL1  (via drill 0.3)
  Top 0.152: BRAIN1.87 78.88,111.26 78.31,111.83 78.31,113.48 77.93,113.86 72.76,113.86 v70.63,111.73 | v102.48,117.67 102.44,117.71 102.44,119.09
  Top 0.2: UTEMP1.2 102.48,119.14 102.44,119.09 R9.1
  Top 0.203: RTC1.7 71.77,92.23 71.35,92.65 v71.44,92.65 | BRAIN1.87 v78.88,107.16 78.88,101.16 75.5,97.78 v75.27,97.78
  Bottom 0.152: v70.63,111.73 70.59,111.73 69.89,111.02 58.9,111.02 48.92,121 37.68,121 U$17.P2
  Bottom 0.203: v75.27,97.78 73.17,95.67 73.17,94.72 71.44,92.98 v71.44,92.65 | v78.88,107.16 82.58,107.16 93.08,117.66 102.47,117.66 v102.48,117.67
CORE_SDA  (via drill 0.3)
  Top 0.152: v51.55,59.2 49.27,61.48 34.66,61.48 U$10.P3 | BRAIN.86 79.28,51.4 78.62,52.06 78.62,53.61 78.06,54.17 71.78,54.17 v69.34,51.73 | 79.66,48.22 v79.66,48.07 | v102.33,61.79 102.38,61.73 102.38,60.47
  Top 0.2: UTEMP.1 102.44,60.41 102.38,60.47 R3.1
  Top 0.203: RTC.6 73.89,32.73 73.98,32.82 v73.98,33.46 | BRAIN.86 79.28,49.05 79.66,48.67 79.66,48.22 | v79.66,48.07 79.66,41.44 75.88,37.66 v75.88,37.14
  Bottom 0.152: v51.55,59.2 59.02,51.73 v69.34,51.73
  Bottom 0.203: v75.88,37.14 73.98,35.24 v73.98,33.46 | v79.66,48.07 82.97,48.07 96.69,61.79 v102.33,61.79
CORE_SDA1  (via drill 0.3)
  Top 0.152: v51.55,119.2 49.27,121.48 34.66,121.48 U$17.P3 | BRAIN1.86 79.28,111.4 78.62,112.06 78.62,113.61 78.06,114.17 71.78,114.17 v69.34,111.73 | 79.66,108.22 v79.66,108.07 | v102.33,121.79 102.38,121.73 102.38,120.47
  Top 0.2: UTEMP1.1 102.44,120.41 102.38,120.47 R8.1
  Top 0.203: RTC1.6 73.89,92.73 73.98,92.82 v73.98,93.46 | BRAIN1.86 79.28,109.06 79.66,108.67 79.66,108.22 | v79.66,108.07 79.66,101.44 75.88,97.66 v75.88,97.14
  Bottom 0.152: v51.55,119.2 59.02,111.73 v69.34,111.73
  Bottom 0.203: v75.88,97.14 73.98,95.24 v73.98,93.46 | v79.66,108.07 82.97,108.07 96.69,121.79 v102.33,121.79
D+  (via drill 0.3)
  Top 0.203: U$8.D+ 90.23,59.65 90.23,56.86 89.69,56.32 89.02,56.32 v89,56.34 | BRAIN.95 75.72,50.31 75.72,49.27 76.56,48.44 77.11,48.44 v77.38,48.16
  Bottom 0.203: v89,56.34 82.5,49.85 79.35,49.85 77.92,48.42 77.63,48.42 v77.38,48.16 77.38,47.62 84.28,40.72 84.28,33.85 91,27.12 96.72,27.12 LOWER.PIN5
  other vias: 99.84,24
D+1  (via drill 0.3)
  Top 0.203: U$15.D+ 90.23,119.65 90.23,116.86 89.69,116.32 89.02,116.32 v89,116.34 | BRAIN1.95 75.72,110.31 75.72,109.27 76.56,108.44 77.11,108.44 v77.38,108.17
  Bottom 0.203: v89,116.34 82.5,109.85 79.35,109.85 77.92,108.42 77.63,108.42 v77.38,108.17 77.38,107.62 84.28,100.72 84.28,93.85 91,87.12 96.72,87.12 LOWER1.PIN5
  other vias: 99.84,84
D-  (via drill 0.3)
  Top 0.203: U$8.D- 90.97,58.98 90.65,58.66 90.65,56.78 89.61,55.74 88.75,55.74 88.14,56.34 v87.92,56.34 | BRAIN.94 76.13,50.3 76.13,49.45 76.28,49.3 76.56,49.3 v76.81,49.04
  Bottom 0.203: v87.92,56.34 81.92,50.34 77.13,50.34 76.81,50.02 v76.81,49.04 76.81,48.46 76.77,48.42 76.77,47.46 83.75,40.48 83.75,33.85 90.85,26.75 96.23,26.75 99.84,23.14 LOWER.PIN16
  other vias: 99.84,19.6
D-1  (via drill 0.3)
  Top 0.203: U$15.D- 90.97,118.98 90.65,118.66 90.65,116.78 89.61,115.74 88.75,115.74 88.14,116.34 v87.92,116.34 | BRAIN1.94 76.13,110.3 76.13,109.44 76.28,109.3 76.56,109.3 v76.81,109.04
  Bottom 0.203: v87.92,116.34 81.92,110.34 77.13,110.34 76.81,110.02 v76.81,109.04 76.81,108.46 76.77,108.42 76.77,107.46 83.75,100.48 83.75,93.85 90.85,86.75 96.23,86.75 99.84,83.14 LOWER1.PIN16
  other vias: 99.84,79.6
EEPROM_PROT  (via drill 0.3)
  Top 0.203: v66.92,36.61 67.66,37.35 BRAIN.126 | v89.68,23.6 LOWER.PIN9
  Bottom 0.203: v66.92,36.61 66.92,35.12 75.28,26.76 85,26.76 87.98,23.78 89.5,23.78 v89.68,23.6
EEPROM_PROT1  (via drill 0.3)
  Top 0.203: v66.92,96.61 67.66,97.35 BRAIN1.126 | v89.68,83.6 LOWER1.PIN9
  Bottom 0.203: v66.92,96.61 66.92,95.12 75.28,86.76 85,86.76 87.98,83.78 89.5,83.78 v89.68,83.6
FLASH_MISO  (via drill 0.3)
  Top 0.203: BRAIN.44 92.38,40.95 92.48,41.05 92.48,42.52 v94.77,44.81 97.75,47.78 97.75,50.9 97.98,51.13 99.9,51.13 100.86,52.09 U$6.P$2 100.86,53.84 101.2,54.19 108.15,54.19 108.48,53.86 U$5.P$2 108.48,52.25 108.78,51.94 109.48,51.94 111.82,49.6 111.82,43.4 111.11,42.68 110.35,42.68 108.48,40.81 U$4.P$2 | U$3.P$2 100.86,41 v100.8,41.06
  Bottom 0.203: v100.8,41.06 98.52,41.06 v94.77,44.81
FLASH_MISO1  (via drill 0.3)
  Top 0.203: BRAIN1.44 92.38,100.95 92.48,101.05 92.48,102.52 v94.77,104.81 97.75,107.78 97.75,110.89 97.98,111.13 99.9,111.13 100.86,112.09 U$12.P$2 100.86,113.84 101.2,114.19 108.15,114.19 108.48,113.86 U$11.P$2 108.48,112.25 108.78,111.94 109.48,111.94 111.82,109.6 111.82,103.4 111.11,102.68 110.35,102.68 108.48,100.81 U$2.P$2 | U$1.P$2 100.86,101 v100.8,101.06
  Bottom 0.203: v100.8,101.06 98.52,101.06 v94.77,104.81
FLASH_MOSI
  Top 0.203: BRAIN.41 95.14,39.75 96.72,38.17 96.72,33.18 U$3.P$5 98.32,32.24 99.14,33.06 103.38,33.06 104.87,31.58 U$4.P$5 104.15,33.36 104.15,42.28 | 104.15,42.28 99.66,42.28 98.32,43.62 U$6.P$5 | 104.15,42.28 104.15,42.55 105.94,44.34 U$5.P$5
FLASH_MOSI1
  Top 0.203: BRAIN1.41 95.14,99.75 96.72,98.17 96.72,93.18 U$1.P$5 98.32,92.24 99.14,93.06 103.38,93.06 104.87,91.58 U$2.P$5 104.15,93.36 104.15,102.28 | 104.15,102.28 99.66,102.28 98.32,103.62 U$12.P$5 | 104.15,102.28 104.15,102.55 105.94,104.34 U$11.P$5
FLASH_S0  (via drill 0.3)
  Top 0.203: BRAIN.55 91.03,45.35 v92.57,43.8 | v102.2,38.5 102.13,38.57 U$3.P$1
  Bottom 0.203: v92.57,43.8 93.33,43.8 99.12,38.01 101.71,38.01 v102.2,38.5
FLASH_S1  (via drill 0.3)
  Top 0.203: BRAIN.56 92,45.75 v93.33,44.41 | v109.79,41.21 109.79,39.74 U$4.P$1
  Bottom 0.203: v93.33,44.41 93.49,44.41 98.21,39.69 108.27,39.69 v109.79,41.21
FLASH_S2  (via drill 0.3)
  Top 0.203: BRAIN.57 94.92,46.15 v96.23,47.46 | v109.74,54.62 v109.75,54.61 U$5.P$1
  Bottom 0.203: v96.23,47.46 100.04,47.46 107.2,54.62 v109.74,54.62
FLASH_S3  (via drill 0.3)
  Top 0.203: BRAIN.58 94.25,46.55 95.47,47.77 v95.47,48.38 | U$6.P$1 102.88,53.16 v102.94,53.1
  Bottom 0.203: v95.47,48.38 100.19,53.1 v102.94,53.1
FLASH_S4  (via drill 0.3)
  Top 0.203: BRAIN1.55 91.03,105.35 v92.57,103.8 | v102.2,98.5 102.13,98.57 U$1.P$1
  Bottom 0.203: v92.57,103.8 93.33,103.8 99.12,98.01 101.71,98.01 v102.2,98.5
FLASH_S5  (via drill 0.3)
  Top 0.203: BRAIN1.56 92,105.75 v93.33,104.41 | v109.79,101.21 109.79,99.74 U$2.P$1
  Bottom 0.203: v93.33,104.41 93.49,104.41 98.21,99.69 108.27,99.69 v109.79,101.21
FLASH_S6  (via drill 0.3)
  Top 0.203: BRAIN1.57 94.92,106.15 v96.23,107.46 | v109.74,114.62 109.75,114.61 U$11.P$1
  Bottom 0.203: v96.23,107.46 100.04,107.46 107.2,114.62 v109.74,114.62
FLASH_S7  (via drill 0.3)
  Top 0.203: BRAIN1.58 94.25,106.55 95.47,107.77 v95.47,108.38 | U$12.P$1 102.88,113.16 v102.94,113.1
  Bottom 0.203: v95.47,108.38 100.19,113.1 v102.94,113.1
FLASH_SCK
  Top 0.203: BRAIN.42 94.32,40.15 97.46,43.29 97.46,45.73 97.69,45.97 99.59,45.97 U$6.P$6 99.59,45.93 99.98,46.33 106.82,46.33 107.21,45.93 U$5.P$6 107.21,44.34 105.16,42.29 105.16,33.63 U$4.P$6 107.21,30.88 106.89,30.55 105.37,30.55 103.21,32.71 99.92,32.71 99.59,32.38 U$3.P$6 99.72,31.45
FLASH_SCK1
  Top 0.203: BRAIN1.42 94.32,100.15 97.46,103.29 97.46,105.73 97.69,105.97 99.59,105.97 U$12.P$6 99.59,105.93 99.98,106.33 106.82,106.33 107.21,105.93 U$11.P$6 107.21,104.34 105.16,102.29 105.16,93.63 U$2.P$6 107.21,90.88 106.89,90.55 105.37,90.55 103.21,92.71 99.92,92.71 99.59,92.38 U$1.P$6 99.72,91.45
GND  (via drill 0.3, 0.35)
  Top 0.152: C12.2 94.47,41.78 v94.48,41.77 | BTN1.A1 31.99,29.38 | 31.99,29.38 v32.02,29.35 | BTN2.A0 31.99,29.38 | BTN2.A1 42.05,29.38 | 42.05,29.38 v42.08,29.35 | BTN3.A0 42.05,29.38 | BTN3.A1 v51.37,29.38 | BRAIN.96 v74.19,50.35 v74.18,50.36 | BTN1.A0 22.62,29.38 v22.6,29.4 | C17.2 v74.21,52.51 v74.2,52.5 | U$6.P$4 98.32,54.28 v98.36,54.32 | U$5.P$4 105.88,53.1 v104.76,53.1 | U$4.P$4 105.94,40.78 v106.07,40.91 | U$3.P$4 98.32,41.23 v98.79,41.69 | C11.2 100.22,43.72 v100.2,43.7 | C10.2 107.82,43.72 v107.8,43.7 | C4.2 v107.8,30.2 | C5.2 100.21,30.26 v100.19,30.24 | U$9.VSS v76.24,63.59
  Top 0.203: BRAIN.106 75.2,45.35 v75.21,45.34 | BRAIN.90 77.68,49.03 v77.67,49.02 | BRAIN.78 82.48,49.28 v82.22,49.02 | BRAIN.64 v87.73,48.95 | BRAIN.53 v87.73,44.55 | BRAIN.45 v87.73,41.35 | BRAIN.38 v86.8,38.55 v86.79,38.56 | BRAIN.31 v87.28,36.49 v87.27,36.5 | BRAIN.25 v84.88,36.5 | BRAIN.14 80.48,36.49 v80.46,36.5 | BRAIN.5 v76.88,36.5 | BRAIN.116 v75.2,41.35 v75.21,41.35 | C15.2 91.33,51.41 v91.25,51.49 | C16.2 v85.91,52 | C22.2 69.76,50.07 v69.78,50.1 | C21.2 68.63,45.3 v68.33,45 | v69.78,34.22 | C13.2 v69.78,34.22 | v70.58,39.91 69.72,40.77 C7.2 C6.2 | C2.2 66.9,40.47 v66.9,41.2 66.9,42.02 C20.2
  Top 0.254: RTC.5 75.89,32.73 v75.87,32.74 | v64,48 U$7.- | FLASH.4 v95.47,31.9 | 108.12,59.2 C3.2 v106.8,62 | 108.12,59.2 108.12,57.98 | 108.12,57.98 108.12,57.8 | 108.12,57.8 108.12,56.61 | UTEMP.4 108.11,56.59 108.12,56.61 | UTEMP.5 108.14,56.59 108.12,56.61 | UTEMP.3 105.03,57.98 108.12,57.98 | UTEMP.6 108.19,57.87 108.12,57.8 | UTEMP.7 108.19,59.13 108.12,59.2
  Top 0.305: C14.2 92.9,47.82 v92.9,48.95 | C18.2 v89.37,33.71 v89.37,33.72 | C19.2 82.29,32.63 82.31,32.66 | v82.21,32.6 82.15,32.66 82.31,32.66 | C1.2 82.31,32.66
  Top 0.406: U$8.GND 88.07,59.73 87.31,58.97 v86.67,58.97
  Top 0.813: UPPER.PIN11 v46.1,74.74
  GND 0.152: 72.43,58.48 72.4,58.48 | v74.18,50.36 74.21,50.36 | v74.2,52.5 74.14,52.5 74.13,52.49 | v106.07,40.91 105.98,40.91 | v98.79,41.69 98.81,41.67 98.82,41.67 | v100.2,43.7 v100.19,43.71 100.19,43.8 | v107.8,43.7 107.81,43.69 107.81,43.65 | v107.8,30.2 107.8,30.23 107.81,30.24
  GND 0.203: v70.58,39.91 70.88,39.91 70.97,40 71,40 | v66.9,41.2 67,41.1 67,41
  GND 0.254: v106.8,62 106.75,61.95 106.75,61.94
  GND 0.813: v46.1,74.74 46.1,74.89 46.09,74.89
  pour GND: 15,80 15,25 70,25 80,15 115,15 115,70 60,70 50,80
GND1  (via drill 0.3, 0.35)
  Top 0.152: C28.2 94.47,101.78 v94.48,101.77 | BTN4.A1 31.99,89.38 | 31.99,89.38 v32.02,89.35 | BTN5.A0 31.99,89.38 | BTN5.A1 42.05,89.38 | 42.05,89.38 v42.08,89.35 | BTN6.A0 42.05,89.38 | BTN6.A1 v51.37,89.38 | BRAIN1.96 v74.19,110.35 v74.18,110.36 | BTN4.A0 22.62,89.38 v22.6,89.4 | C33.2 v74.21,112.51 v74.2,112.5 | U$12.P$4 98.32,114.28 v98.36,114.32 | U$11.P$4 105.88,113.1 v104.76,113.1 | U$2.P$4 105.94,100.78 v106.07,100.91 | U$1.P$4 98.32,101.22 v98.79,101.69 | C27.2 100.22,103.72 v100.2,103.7 | C26.2 107.82,103.72 v107.8,103.7 | C24.2 v107.8,90.2 | C25.2 100.21,90.26 v100.19,90.24 | U$16.VSS v76.24,123.59
  Top 0.203: BRAIN1.106 75.2,105.35 v75.21,105.34 | BRAIN1.90 77.68,109.03 v77.67,109.02 | BRAIN1.78 82.48,109.28 v82.22,109.02 | BRAIN1.64 v87.73,108.95 | BRAIN1.53 v87.73,104.55 | BRAIN1.45 v87.73,101.35 | BRAIN1.38 v86.8,98.55 v86.79,98.56 | BRAIN1.31 v87.28,96.49 v87.27,96.5 | BRAIN1.25 v84.88,96.5 | BRAIN1.14 80.48,96.49 v80.46,96.5 | BRAIN1.5 v76.88,96.5 | BRAIN1.116 v75.2,101.35 v75.21,101.35 | C31.2 91.33,111.41 v91.25,111.5 | C32.2 v85.91,112 | C38.2 69.76,110.07 v69.78,110.1 | C37.2 68.63,105.31 v68.33,105 | v69.78,94.22 | C29.2 v69.78,94.22 | v70.58,99.92 69.72,100.77 C40.2 C39.2 | C9.2 66.9,100.47 v66.9,101.2 66.9,102.02 C36.2
  Top 0.254: RTC1.5 75.89,92.73 v75.87,92.74 | v64,108 U$13.- | FLASH1.4 v95.47,91.9 | 108.12,119.2 C23.2 v106.8,122 | 108.12,119.2 108.12,117.98 | 108.12,117.98 108.12,117.8 | 108.12,117.8 108.12,116.61 | UTEMP1.4 108.11,116.59 108.12,116.61 | UTEMP1.5 108.14,116.59 108.12,116.61 | UTEMP1.3 105.03,117.98 108.12,117.98 | UTEMP1.6 108.19,117.86 108.12,117.8 | UTEMP1.7 108.19,119.14 108.12,119.2
  Top 0.305: C30.2 92.9,107.82 v92.9,108.95 | C34.2 v89.37,93.71 v89.37,93.72 | C35.2 82.29,92.64 82.31,92.66 | v82.21,92.6 82.15,92.66 82.31,92.66 | C8.2 82.31,92.66
  Top 0.406: U$15.GND 88.07,119.73 87.31,118.97 v86.67,118.97
  Top 0.813: UPPER1.PIN11 v46.1,134.74
  GND 0.152: v74.18,110.36 74.21,110.36 | v74.2,112.5 74.14,112.5 74.13,112.49 | v106.07,100.91 105.98,100.91 | v98.79,101.69 98.81,101.67 98.82,101.67 | v100.2,103.7 v100.19,103.71 100.19,103.8 | v107.8,103.7 107.81,103.69 107.81,103.65 | v107.8,90.2 107.8,90.23 107.81,90.24
  GND 0.203: v70.58,99.92 70.88,99.92 70.97,100 71,100 | v66.9,101.2 67,101.1 67,101
  GND 0.254: v106.8,122 106.75,121.94
  GND 0.813: v46.1,134.74 46.1,134.89 46.09,134.89
  pour PWR: 15,140 50,140 60,130 115,130 115,75 75,75 65,85 15,85
GPS_RX
  Top 0.152: BRAIN.101 69.59,47.35 68.7,48.24 68.7,50.51 60.87,58.34 60.87,61.98 55.43,67.43 35.12,67.43 34.7,67.84 UPPER.PIN6
GPS_RX1
  Top 0.152: BRAIN1.101 69.59,107.35 68.7,108.24 68.7,110.51 60.87,118.34 60.87,121.98 55.43,127.43 35.12,127.43 34.7,127.84 UPPER1.PIN6
GPS_TX
  Top 0.152: BRAIN.100 69.62,47.75 69.01,48.37 69.01,50.78 61.18,58.61 61.18,62.11 55.56,67.73 36.49,67.73 36.03,68.19 36.03,73.79 35.42,74.4 UPPER.PIN15
GPS_TX1
  Top 0.152: BRAIN1.100 69.62,107.75 69.01,108.36 69.01,110.78 61.18,118.61 61.18,122.11 55.56,127.73 36.49,127.73 36.03,128.19 36.03,133.79 35.42,134.4 UPPER1.PIN15
HOTSWAP_INT  (via drill 0.3)
  Top 0.203: v68.14,35.4 69.29,36.55 BRAIN.128
  Bottom 0.203: v68.14,35.4 68.14,34.91 75.58,27.47 85.32,27.47 88.2,24.59 91.63,24.59 LOWER.PIN8
  other vias: 92.22,24
HOTSWAP_INT1  (via drill 0.3)
  Top 0.203: v68.14,95.4 69.29,96.55 BRAIN1.128
  Bottom 0.203: v68.14,95.4 68.14,94.91 75.58,87.47 85.32,87.47 88.2,84.59 91.63,84.59 LOWER1.PIN8
  other vias: 92.22,84
MOD_G0  (via drill 0.3)
  Top 0.203: v66.31,37.22 66.85,37.75 BRAIN.125 | v87.01,23.46 87.01,24.21 LOWER.PIN10
  Bottom 0.203: v66.31,37.22 66.31,35.23 75.21,26.33 84.67,26.33 87.01,23.99 v87.01,23.46
MOD_G1  (via drill 0.3)
  Top 0.203: v66.31,97.22 66.85,97.75 BRAIN1.125 | v87.01,83.46 87.01,84.21 LOWER1.PIN10
  Bottom 0.203: v66.31,97.22 66.31,95.23 75.21,86.33 84.67,86.33 87.01,83.99 v87.01,83.46
MOD_G2  (via drill 0.3)
  Top 0.203: v67.53,36 68.48,36.95 BRAIN.127
  Bottom 0.203: v67.53,36 67.53,35.02 75.43,27.12 85.14,27.12 88.02,24.24 91.11,24.24 92.22,23.12 LOWER.PIN13
  other vias: 92.22,19.6
MOD_G3  (via drill 0.3)
  Top 0.203: v67.53,96 68.48,96.95 BRAIN1.127
  Bottom 0.203: v67.53,96 67.53,95.02 75.43,87.12 85.14,87.12 88.02,84.24 91.11,84.24 92.22,83.12 LOWER1.PIN13
  other vias: 92.22,79.6
MOD_G4  (via drill 0.3)
  Top 0.203: BRAIN.11 79.28,36.05 78.08,37.25 v77.75,37.25
  Bottom 0.203: v77.75,37.25 79.75,35.25 79.75,33.54 88.19,25.1 92.78,25.1 94.76,23.12 LOWER.PIN14
  other vias: 94.76,19.6
MOD_G5  (via drill 0.3)
  Top 0.203: BRAIN.12 79.68,36.22 77.79,38.11 v77.75,38.11
  Bottom 0.203: v77.75,38.11 80.15,35.71 80.15,33.66 88.31,25.5 93.26,25.5 LOWER.PIN7
  other vias: 94.76,24
MOD_G6  (via drill 0.3)
  Top 0.203: BRAIN.17 81.72,35.11 81.72,34.25 82.22,33.75 v82.5,33.75
  Bottom 0.203: v82.5,33.75 82.81,33.75 90.56,26 94.43,26 97.3,23.13 LOWER.PIN15
  other vias: 97.3,19.6
MOD_G7  (via drill 0.3)
  Top 0.203: BRAIN.18 82.08,36.19 v83.14,37.25
  Bottom 0.203: v83.14,37.25 83.14,33.94 90.71,26.38 96.08,26.38 97.3,25.16 LOWER.PIN6
  other vias: 97.3,24
MOD_G8
  Top 0.152: BRAIN.108 72.7,44.55 72.57,44.42 68.09,44.42 67.48,45.02 67.48,49.29 59.65,57.12 59.65,61.48 54.92,66.21 30.7,66.21 29.62,67.28 UPPER.PIN4
MOD_G9
  Top 0.152: BRAIN.109 72.73,44.15 72.7,44.12 67.96,44.12 67.18,44.9 67.18,48.98 59.35,56.81 59.35,61.35 54.8,65.9 29.17,65.9 28.36,66.72 28.36,73.73 27.8,74.28 27.2,74.28 UPPER.PIN18
MOD_G10
  Top 0.152: BRAIN.110 67.89,43.75 66.87,44.77 66.87,48.68 59.04,56.51 59.04,61.23 54.67,65.6 27.8,65.6 27.04,66.36 27.04,69.96 UPPER.PIN3
MOD_G11
  Top 0.152: BRAIN.111 67.86,43.35 66.57,44.65 66.57,48.38 58.74,56.2 58.74,61.1 54.55,65.29 26.43,65.29 25.71,66.01 25.71,74.33 25.3,74.74 UPPER.PIN19
MOD_G12
  Top 0.152: BRAIN.112 67.83,42.95 66.26,44.52 66.26,48.07 58.43,55.9 58.43,60.97 54.42,64.99 25.21,64.99 24.54,65.66 UPPER.PIN2
MOD_G13  (via drill 0.3)
  Top 0.203: v65.1,38.43 65.22,38.55 BRAIN.123
  Bottom 0.203: v65.1,38.43 65.1,35.44 82.03,18.5 88.88,18.5 89.68,19.3 LOWER.PIN12
  other vias: 89.68,19.26
MOD_G14  (via drill 0.3)
  Top 0.203: v65.71,37.83 66.03,38.15 BRAIN.124
  Bottom 0.203: v65.71,37.83 65.71,35.33 82.16,18.88 86.76,18.88 LOWER.PIN11
  other vias: 87.14,19.26
MOD_G15  (via drill 0.3)
  Top 0.203: BRAIN1.11 79.28,96.05 78.08,97.25 v77.75,97.25
  Bottom 0.203: v77.75,97.25 79.75,95.25 79.75,93.54 88.19,85.1 92.78,85.1 94.76,83.12 LOWER1.PIN14
  other vias: 94.76,79.6
MOD_G16  (via drill 0.3)
  Top 0.203: BRAIN1.12 79.68,96.22 77.79,98.11 v77.75,98.11
  Bottom 0.203: v77.75,98.11 80.15,95.71 80.15,93.66 88.31,85.5 93.26,85.5 LOWER1.PIN7
  other vias: 94.76,84
MOD_G17  (via drill 0.3)
  Top 0.203: BRAIN1.17 81.72,95.11 81.72,94.25 82.22,93.75 v82.5,93.75
  Bottom 0.203: v82.5,93.75 82.81,93.75 90.56,86 94.43,86 97.3,83.13 LOWER1.PIN15
  other vias: 97.3,79.6
MOD_G18  (via drill 0.3)
  Top 0.203: BRAIN1.18 82.08,96.19 v83.14,97.25
  Bottom 0.203: v83.14,97.25 83.14,93.94 90.71,86.38 96.08,86.38 97.3,85.16 LOWER1.PIN6
  other vias: 97.3,84
MOD_G19
  Top 0.152: BRAIN1.108 72.7,104.55 72.57,104.42 68.09,104.42 67.48,105.03 67.48,109.29 59.65,117.12 59.65,121.48 54.92,126.21 30.7,126.21 29.62,127.28 UPPER1.PIN4
MOD_G20
  Top 0.152: BRAIN1.109 72.73,104.15 72.7,104.11 67.96,104.11 67.18,104.9 67.18,108.98 59.35,116.81 59.35,121.35 54.8,125.9 29.17,125.9 28.36,126.72 28.36,133.73 27.8,134.28 27.2,134.28 UPPER1.PIN18
MOD_G21
  Top 0.152: BRAIN1.110 67.89,103.75 66.87,104.77 66.87,108.68 59.04,116.51 59.04,121.22 54.67,125.6 27.8,125.6 27.04,126.36 27.04,129.96 UPPER1.PIN3
MOD_G22
  Top 0.152: BRAIN1.111 67.86,103.35 66.57,104.65 66.57,108.38 58.74,116.2 58.74,121.1 54.55,125.29 26.43,125.29 25.71,126.01 25.71,134.33 25.3,134.74 UPPER1.PIN19
MOD_G23
  Top 0.152: BRAIN1.112 67.83,102.95 66.26,104.52 66.26,108.07 58.43,115.9 58.43,120.97 54.42,124.99 25.21,124.99 24.54,125.66 UPPER1.PIN2
MOD_G24  (via drill 0.3)
  Top 0.203: v65.1,98.43 65.22,98.55 BRAIN1.123
  Bottom 0.203: v65.1,98.43 65.1,95.44 82.03,78.5 88.88,78.5 89.68,79.31 LOWER1.PIN12
  other vias: 89.68,79.26
MOD_G25  (via drill 0.3)
  Top 0.203: v65.71,97.83 66.03,98.15 BRAIN1.124
  Bottom 0.203: v65.71,97.83 65.71,95.33 82.16,78.88 86.76,78.88 LOWER1.PIN11
  other vias: 87.14,79.26
MOD_MISO  (via drill 0.3)
  Top 0.203: BRAIN.50 90,43.35 v90.39,43.74
  Bottom 0.152: LOWER.PIN1 110,24.25
  Bottom 0.203: v90.39,43.74 91.37,43.74 103.74,31.37 103.74,29.09 108.5,24.34 LOWER.PIN1
  other vias: 110,24.34
MOD_MISO1  (via drill 0.3)
  Top 0.203: BRAIN1.50 90,103.35 v90.39,103.74
  Bottom 0.152: LOWER1.PIN1 110,84.25
  Bottom 0.203: v90.39,103.74 91.37,103.74 103.74,91.37 103.74,89.09 108.5,84.34 LOWER1.PIN1
  other vias: 110,84.34
MOD_MOSI  (via drill 0.3)
  Top 0.203: BRAIN.47 88.12,42.15 v87.73,42.55
  Bottom 0.152: 107.5,19.25 107.49,19.26 LOWER.PIN19
  Bottom 0.203: v87.73,42.55 90.48,42.55 103,30.03 103,28.8 106.81,24.98 106.81,19.44 107,19.25 107.5,19.25
  other vias: 107.46,19.26
MOD_MOSI1  (via drill 0.3)
  Top 0.203: BRAIN1.47 88.12,102.15 v87.73,102.55
  Bottom 0.152: 107.5,79.25 107.49,79.26 LOWER1.PIN19
  Bottom 0.203: v87.73,102.55 90.48,102.55 103,90.03 103,88.8 106.81,84.98 106.81,79.44 107,79.25 107.5,79.25
  other vias: 107.46,79.26
MOD_SCK  (via drill 0.3)
  Top 0.203: BRAIN.48 90.97,42.55 v91.28,42.86
  Bottom 0.152: 107.5,24.25 107.46,24.29 LOWER.PIN2
  Bottom 0.203: v91.28,42.86 91.28,42.56 103.37,30.48 103.37,28.95 107.5,24.81 107.5,24.25
  other vias: 107.46,24.34
MOD_SCK1  (via drill 0.3)
  Top 0.203: BRAIN1.48 90.97,102.55 v91.28,102.86
  Bottom 0.152: 107.5,84.25 107.46,84.29 LOWER1.PIN2
  Bottom 0.203: v91.28,102.86 91.28,102.56 103.37,90.48 103.37,88.94 107.5,84.81 107.5,84.25
  other vias: 107.46,84.34
MOD_SCL  (via drill 0.3)
  Top 0.203: v86.5,47.25 85.28,48.47 BRAIN.71
  Bottom 0.203: LOWER.PIN18 104.31,20.21 104.31,26.44 102.25,28.5 102.25,29.65 91.9,40 87.25,40 86.5,40.75 v86.5,47.25
  other vias: 104.92,19.6
MOD_SCL1  (via drill 0.3)
  Top 0.203: v86.5,107.25 85.28,108.47 BRAIN1.71
  Bottom 0.203: LOWER1.PIN18 104.31,80.21 104.31,86.44 102.25,88.5 102.25,89.65 91.9,100 87.25,100 86.5,100.75 v86.5,107.25
  other vias: 104.92,79.6
MOD_SDA  (via drill 0.3)
  Top 0.203: BRAIN.70 85.68,49.1 86.78,48 v87.5,48
  Bottom 0.203: v87.5,48 87.5,45.18 86.87,44.55 86.87,40.9 87.39,40.37 92.05,40.37 102.62,29.8 102.62,28.65 105,26.27 105,24 LOWER.PIN3
  other vias: 104.92,24
MOD_SDA1  (via drill 0.3)
  Top 0.203: BRAIN1.70 85.68,109.1 86.78,108 v87.5,108
  Bottom 0.203: v87.5,108 87.5,105.18 86.87,104.55 86.87,100.9 87.39,100.37 92.05,100.37 102.62,89.8 102.62,88.65 105,86.27 105,84 LOWER1.PIN3
  other vias: 104.92,84
N$1
  Top 0.254: D2.A 59.15,91.56 R6.2
N$2
  Top 0.254: D1.A 59.15,31.56 R1.2
N$3
  Top 0.152: RTC.1 77.88,30.73 U$14.P$2
N$4
  Top 0.152: U$14.P$1 79.66,31.23 RTC.2
N$5
  Top 0.152: RTC1.1 77.88,90.73 U$18.P$2
N$6
  Top 0.203: BRAIN.115 71.83,41.75 C6.1 C7.1
N$7
  Top 0.152: U$18.P$1 79.66,91.23 RTC1.2
N$8
  Top 0.203: BRAIN1.115 71.83,101.75 C39.1 C40.1
QSPI_CS
  Top 0.152: R5.1 89.37,28.86
  Top 0.2: 92,28.86 89.37,28.86
  Top 0.203: BRAIN.40 | BRAIN.40 | BRAIN.40 94.92,39.35 96.29,37.98 96.29,29.15 95.99,28.86 92,28.86 91.87,28.86 91.67,29.06 FLASH.1
QSPI_CS1
  Top 0.152: R10.1 89.37,88.86
  Top 0.2: 92,88.86 89.37,88.86
  Top 0.203: BRAIN1.40 | BRAIN1.40 | BRAIN1.40 94.92,99.35 96.29,97.98 96.29,89.15 95.99,88.86 92,88.86 91.87,88.86 91.67,89.06 FLASH1.1
QSPI_IO0  (via drill 0.3)
  Top 0.152: BRAIN.33 89.08,35.54 v89.05,35.51 | v95.47,35.28 FLASH.5
  Bottom 0.203: v95.47,35.28 89.28,35.28 v89.05,35.51
QSPI_IO1
  Top 0.152: BRAIN.34
  Top 0.203: FLASH.2 92.94,32.99 90.74,35.18 90.74,36.52 90.31,36.95 BRAIN.34
QSPI_IO2
  Top 0.152: BRAIN.35
  Top 0.203: FLASH.3 94.2,32.23 91.1,35.33 91.1,36.69 90.43,37.35 BRAIN.35
QSPI_IO3
  Top 0.203: FLASH.7 92.94,38.14 92.72,38.35 91.04,38.35 90.44,37.75 BRAIN.36
QSPI_IO4  (via drill 0.3)
  Top 0.152: BRAIN1.33 89.08,95.54 v89.05,95.51 | v95.47,95.28 FLASH1.5
  Bottom 0.203: v95.47,95.28 89.28,95.28 v89.05,95.51
QSPI_IO5
  Top 0.152: BRAIN1.34
  Top 0.203: FLASH1.2 92.94,92.99 90.74,95.18 90.74,96.52 90.31,96.95 BRAIN1.34
QSPI_IO6
  Top 0.152: BRAIN1.35
  Top 0.203: FLASH1.3 94.2,92.22 91.1,95.33 91.1,96.69 90.43,97.36 BRAIN1.35
QSPI_IO7
  Top 0.203: FLASH1.7 92.94,98.14 92.72,98.35 91.04,98.35 90.44,97.75 BRAIN1.36
QSPI_SCK
  Top 0.203: FLASH.6 94.2,38.11 93.36,38.96 BRAIN.39
QSPI_SCK1
  Top 0.203: FLASH1.6 94.2,98.11 93.36,98.96 BRAIN1.39
RAD_SCL  (via drill 0.3)
  Top 0.203: BRAIN.77 82.92,50.31 82.92,49.34 84.14,48.13 v84.14,47.75
  Bottom 0.203: v84.14,47.75 84.14,47.5 | 84.14,47.5 | 84.14,47.5 85.5,46.14 85.5,36.8 86.3,36 86.3,32.35 91.15,27.5 98.36,27.5 101.76,24.09 101.76,20.22 LOWER.PIN17
  other vias: 102.38,19.6
RAD_SCL1  (via drill 0.3)
  Top 0.203: BRAIN1.77 82.92,110.31 82.92,109.34 84.14,108.13 v84.14,107.75
  Bottom 0.203: v84.14,107.75 84.14,107.5 | 84.14,107.5 | 84.14,107.5 85.5,106.14 85.5,96.8 86.3,96 86.3,92.35 91.15,87.5 98.36,87.5 101.76,84.09 101.76,80.22 LOWER1.PIN17
  other vias: 102.38,79.6
RAD_SDA  (via drill 0.3)
  Top 0.203: BRAIN.76 83.33,50.3 83.33,49.45 85,47.77 v85,47.5 | 102.38,24.75 LOWER.PIN4
  Bottom 0.203: LOWER.PIN4 98.51,27.87 91.3,27.87 86.67,32.49 86.67,36.14 85.87,36.94 85.87,46.63 v85,47.5
  other vias: 102.38,24
RAD_SDA1  (via drill 0.3)
  Top 0.203: BRAIN1.76 83.33,110.3 83.33,109.44 85,107.77 v85,107.5 | 102.38,84.75 LOWER1.PIN4
  Bottom 0.203: LOWER1.PIN4 98.51,87.87 91.3,87.87 86.67,92.49 86.67,96.14 85.87,96.94 85.87,106.63 v85,107.5
  other vias: 102.38,84
RADIO_MISO
  Top 0.152: BRAIN.105 72.15,45.75 71.65,46.24 69.4,46.24 67.79,47.86 67.79,49.59 59.96,57.42 59.96,61.6 55.05,66.51 31.46,66.51 30.85,67.12 30.85,73.95 30.4,74.4 UPPER.PIN17
RADIO_MISO1
  Top 0.152: BRAIN1.105 72.15,105.75 71.65,106.25 69.4,106.25 67.79,107.86 67.79,109.59 59.96,117.42 59.96,121.6 55.05,126.51 31.46,126.51 30.85,127.12 30.85,133.95 30.4,134.4 UPPER1.PIN17
RADIO_MOSI
  Top 0.152: BRAIN.102 69.56,46.95 68.4,48.11 68.4,50.2 60.57,58.03 60.57,61.86 55.3,67.12 34.35,67.12 33.44,68.03 33.44,73.79 32.83,74.4 UPPER.PIN16
RADIO_MOSI1
  Top 0.152: BRAIN1.102 69.56,106.95 68.4,108.11 68.4,110.2 60.57,118.03 60.57,121.86 55.3,127.12 34.35,127.12 33.44,128.03 33.44,133.79 32.83,134.4 UPPER1.PIN16
RADIO_SCK
  Top 0.152: BRAIN.103 69.53,46.55 68.09,47.99 68.09,49.9 60.26,57.73 60.26,61.73 55.18,66.82 32.37,66.82 32.16,67.03 UPPER.PIN5
RADIO_SCK1
  Top 0.152: BRAIN1.103 69.53,106.55 68.09,107.99 68.09,109.9 60.26,117.73 60.26,121.73 55.18,126.82 32.37,126.82 32.16,127.03 UPPER1.PIN5
RESET  (via drill 0.3)
  Top 0.152: BRAIN.114 75.93,42.15 v76.42,42.63 | v63.1,60.9 64.23,60.9 R2.1
  Bottom 0.152: v76.42,42.63 73.39,45.66 73.39,50.94 71.84,52.49 67.88,52.49 61.94,58.43 | 61.94,58.43 49.3,71.07 38.31,71.07 UPPER.PIN7 | 61.94,58.43 61.94,59.74 v63.1,60.9
  other vias: 37.24,70
RESET1  (via drill 0.3)
  Top 0.152: BRAIN1.114 75.93,102.15 v76.42,102.64 | v63.1,120.9 64.23,120.9 R7.1
  Bottom 0.152: v76.42,102.64 73.39,105.66 73.39,110.94 71.84,112.49 67.88,112.49 61.94,118.43 | 61.94,118.43 49.3,131.07 38.31,131.07 UPPER1.PIN7 | 61.94,118.43 61.94,119.74 v63.1,120.9
  other vias: 37.24,130
SD_MISO  (via drill 0.3)
  Top 0.152: BRAIN.85 79.68,52.73 v79.62,52.8 | v77.33,63.46 77.33,64.87 U$9.DAT0
  Bottom 0.152: v79.62,52.8 81.38,52.8 82.04,53.46 82.04,58.76 v77.33,63.46
SD_MISO1  (via drill 0.3)
  Top 0.152: BRAIN1.85 79.68,112.73 v79.62,112.8 | v77.33,123.46 77.33,124.87 U$16.DAT0
  Bottom 0.152: v79.62,112.8 81.38,112.8 82.04,113.46 82.04,118.76 v77.33,123.46
SD_MOSI  (via drill 0.3)
  Top 0.152: BRAIN.82 80.88,51.44 81.13,51.68 81.13,53.41 v81.43,53.71 | v72.92,63.47 72.92,64.86 U$9.CMD
  Bottom 0.152: v81.43,53.71 72.92,62.22 v72.92,63.47
SD_MOSI1  (via drill 0.3)
  Top 0.152: BRAIN1.82 80.88,111.44 81.13,111.68 81.13,113.41 v81.43,113.71 | v72.92,123.47 72.92,124.86 U$16.CMD
  Bottom 0.152: v81.43,113.71 72.92,122.22 v72.92,123.47
SD_SCK
  Top 0.152: 80.41,50.97 80.41,50.94 80.48,50.87 BRAIN.83 80.41,50.97 | U$9.CLK 75.14,63.54 80.82,57.85 80.82,51.81 80.41,51.4 80.41,50.97
SD_SCK1
  Top 0.152: 80.41,110.97 80.41,110.94 80.48,110.87 BRAIN1.83 80.41,110.97 | U$16.CLK 75.14,123.54 80.82,117.86 80.82,111.81 80.41,111.39 80.41,110.97
SD_SS
  Top 0.152: 80.08,50.81 BRAIN.84 80.08,50.81 | U$9.CD/DAT3 71.84,63.69 80.52,55.01 80.52,52.25 80.08,51.81 80.08,50.81
SD_SS1
  Top 0.152: 80.08,110.81 BRAIN1.84 80.08,110.81 | U$16.CD/DAT3 71.84,123.69 80.52,115.01 80.52,112.25 80.08,111.81 80.08,110.81
SWCLK
  Top 0.152: 71.85,39.33 66.06,39.33 65.86,39.53 65.86,47.87 58.13,55.59 58.13,60.85 54.29,64.68 24.27,64.68 22,66.95 UPPER.PIN1
  Top 0.203: BRAIN.119 72.66,40.15 71.85,39.33
SWCLK1
  Top 0.152: 71.85,99.33 66.06,99.33 65.86,99.53 65.86,107.87 58.13,115.59 58.13,120.85 54.29,124.68 24.27,124.68 22,126.95 UPPER1.PIN1
  Top 0.203: BRAIN1.119 72.66,100.15 71.85,99.33
SWDIO
  Top 0.152: UPPER.PIN20 20.94,74.74 20.18,73.98 20.18,68.34 24.14,64.38 54.17,64.38 57.82,60.72 57.82,55.29 65.55,47.56 65.55,39.41 65.98,38.98 72,38.98
  Top 0.203: BRAIN.120 72.77,39.75 72,38.98
SWDIO1
  Top 0.152: UPPER1.PIN20 20.94,134.74 20.18,133.98 20.18,128.34 24.14,124.38 54.17,124.38 57.82,120.72 57.82,115.29 65.55,107.56 65.55,99.41 65.98,98.98 72,98.98
  Top 0.203: BRAIN1.120 72.77,99.75 72,98.98
V1
  Top 0.406: 91.83,119.73 U$15.VCC
  Top 0.508: LOWER1.PIN20 110,80.16 112.42,82.57 112.42,114.15 110.82,115.74 96.94,115.74 92.96,119.73 91.83,119.73
V5
  Top 0.406: 91.83,59.73 U$8.VCC
  Top 0.508: LOWER.PIN20 110,20.16 112.42,22.57 112.42,54.15 110.82,55.74 96.94,55.74 92.96,59.73 91.83,59.73
VBACKUP  (via drill 0.3)
  Top 0.254: 63.99,31.12 D1.C 63.93,34.92 U$7.+ 57.47,41.38 57.47,60.57 54.02,64.02 45.28,64.02 v45.06,63.8
  Top 0.305: D1.C 71.12,31.18 72.25,30.05 74.49,30.05 74.88,30.44 74.88,30.82 75.78,31.73 RTC.3
  Bottom 0.254: v45.06,63.8 44.86,63.99 UPPER.PIN10
  other vias: 44.86,69.66
VBACKUP1  (via drill 0.3)
  Top 0.254: 63.99,91.12 D2.C 63.93,94.92 U$13.+ 57.47,101.38 57.47,120.57 54.02,124.02 45.28,124.02 v45.06,123.8
  Top 0.305: D2.C 71.12,91.18 72.25,90.05 74.49,90.05 74.88,90.44 74.88,90.82 75.78,91.73 RTC1.3
  Bottom 0.254: v45.06,123.8 44.86,123.99 UPPER1.PIN10
  other vias: 44.86,129.66

## Text on the board
tNames: 3 | 2 | SCAP | 0 | 1 | 3 | 2 | SCAP | 0 | 1
Vscore: PA1 | PA1